# EAGLE board Qwiic_Differential_Pressure_Sensor-SDP31-Panel (EAGLE 9.6.2), part 1 of 3
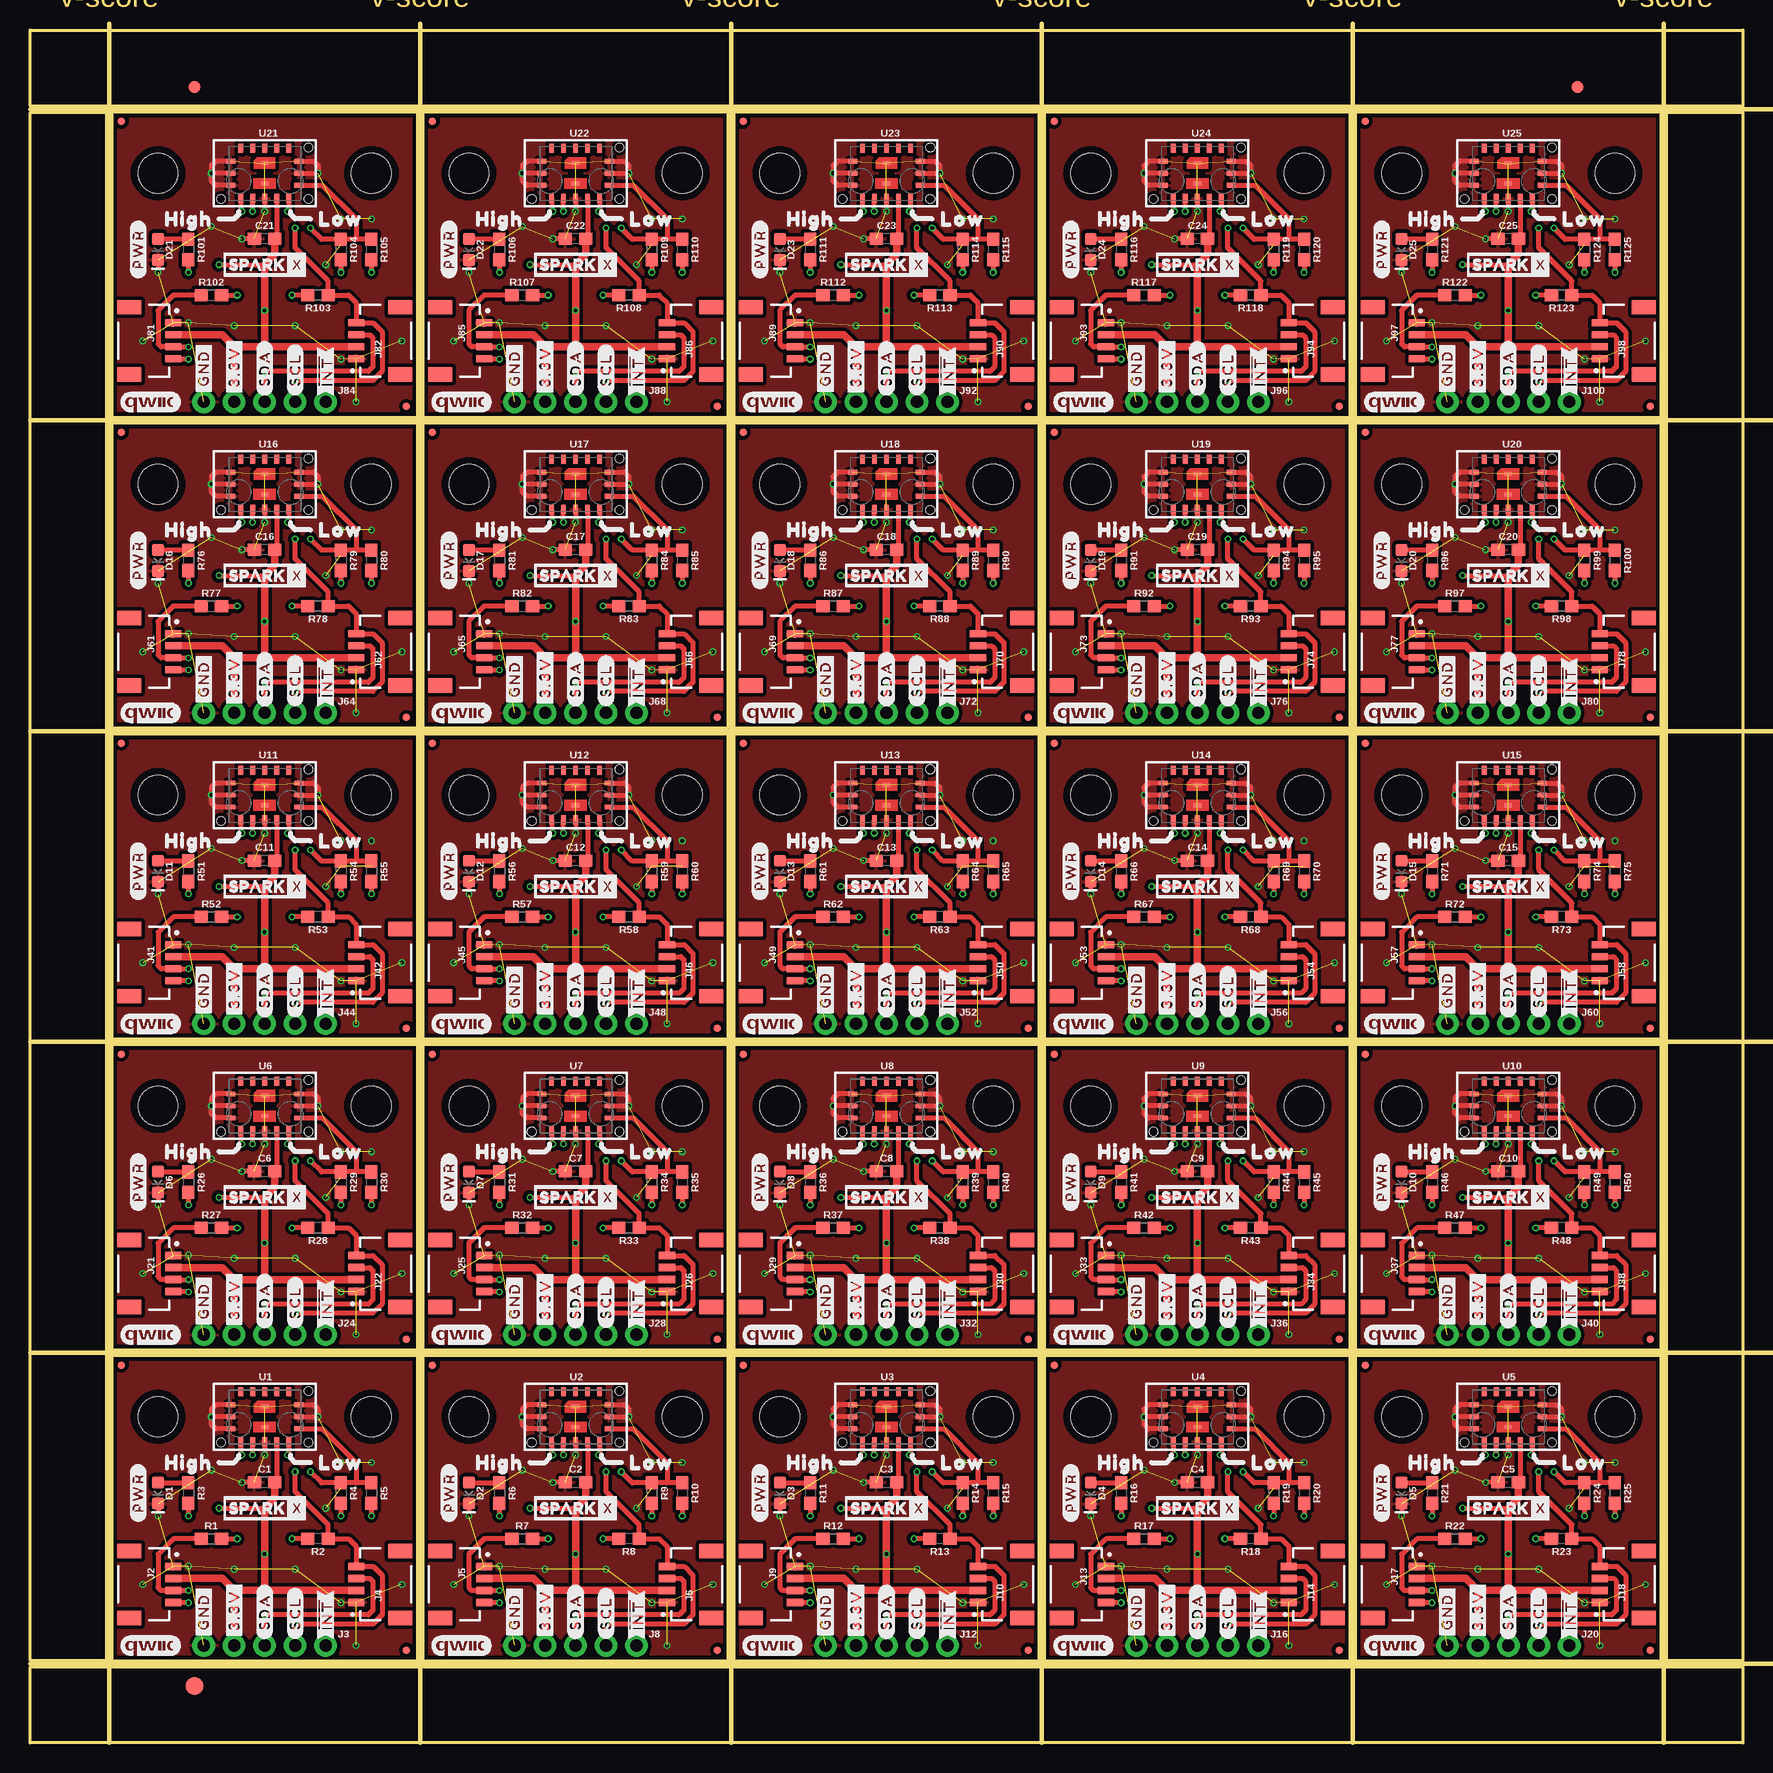
[diagram p0: board, top side]
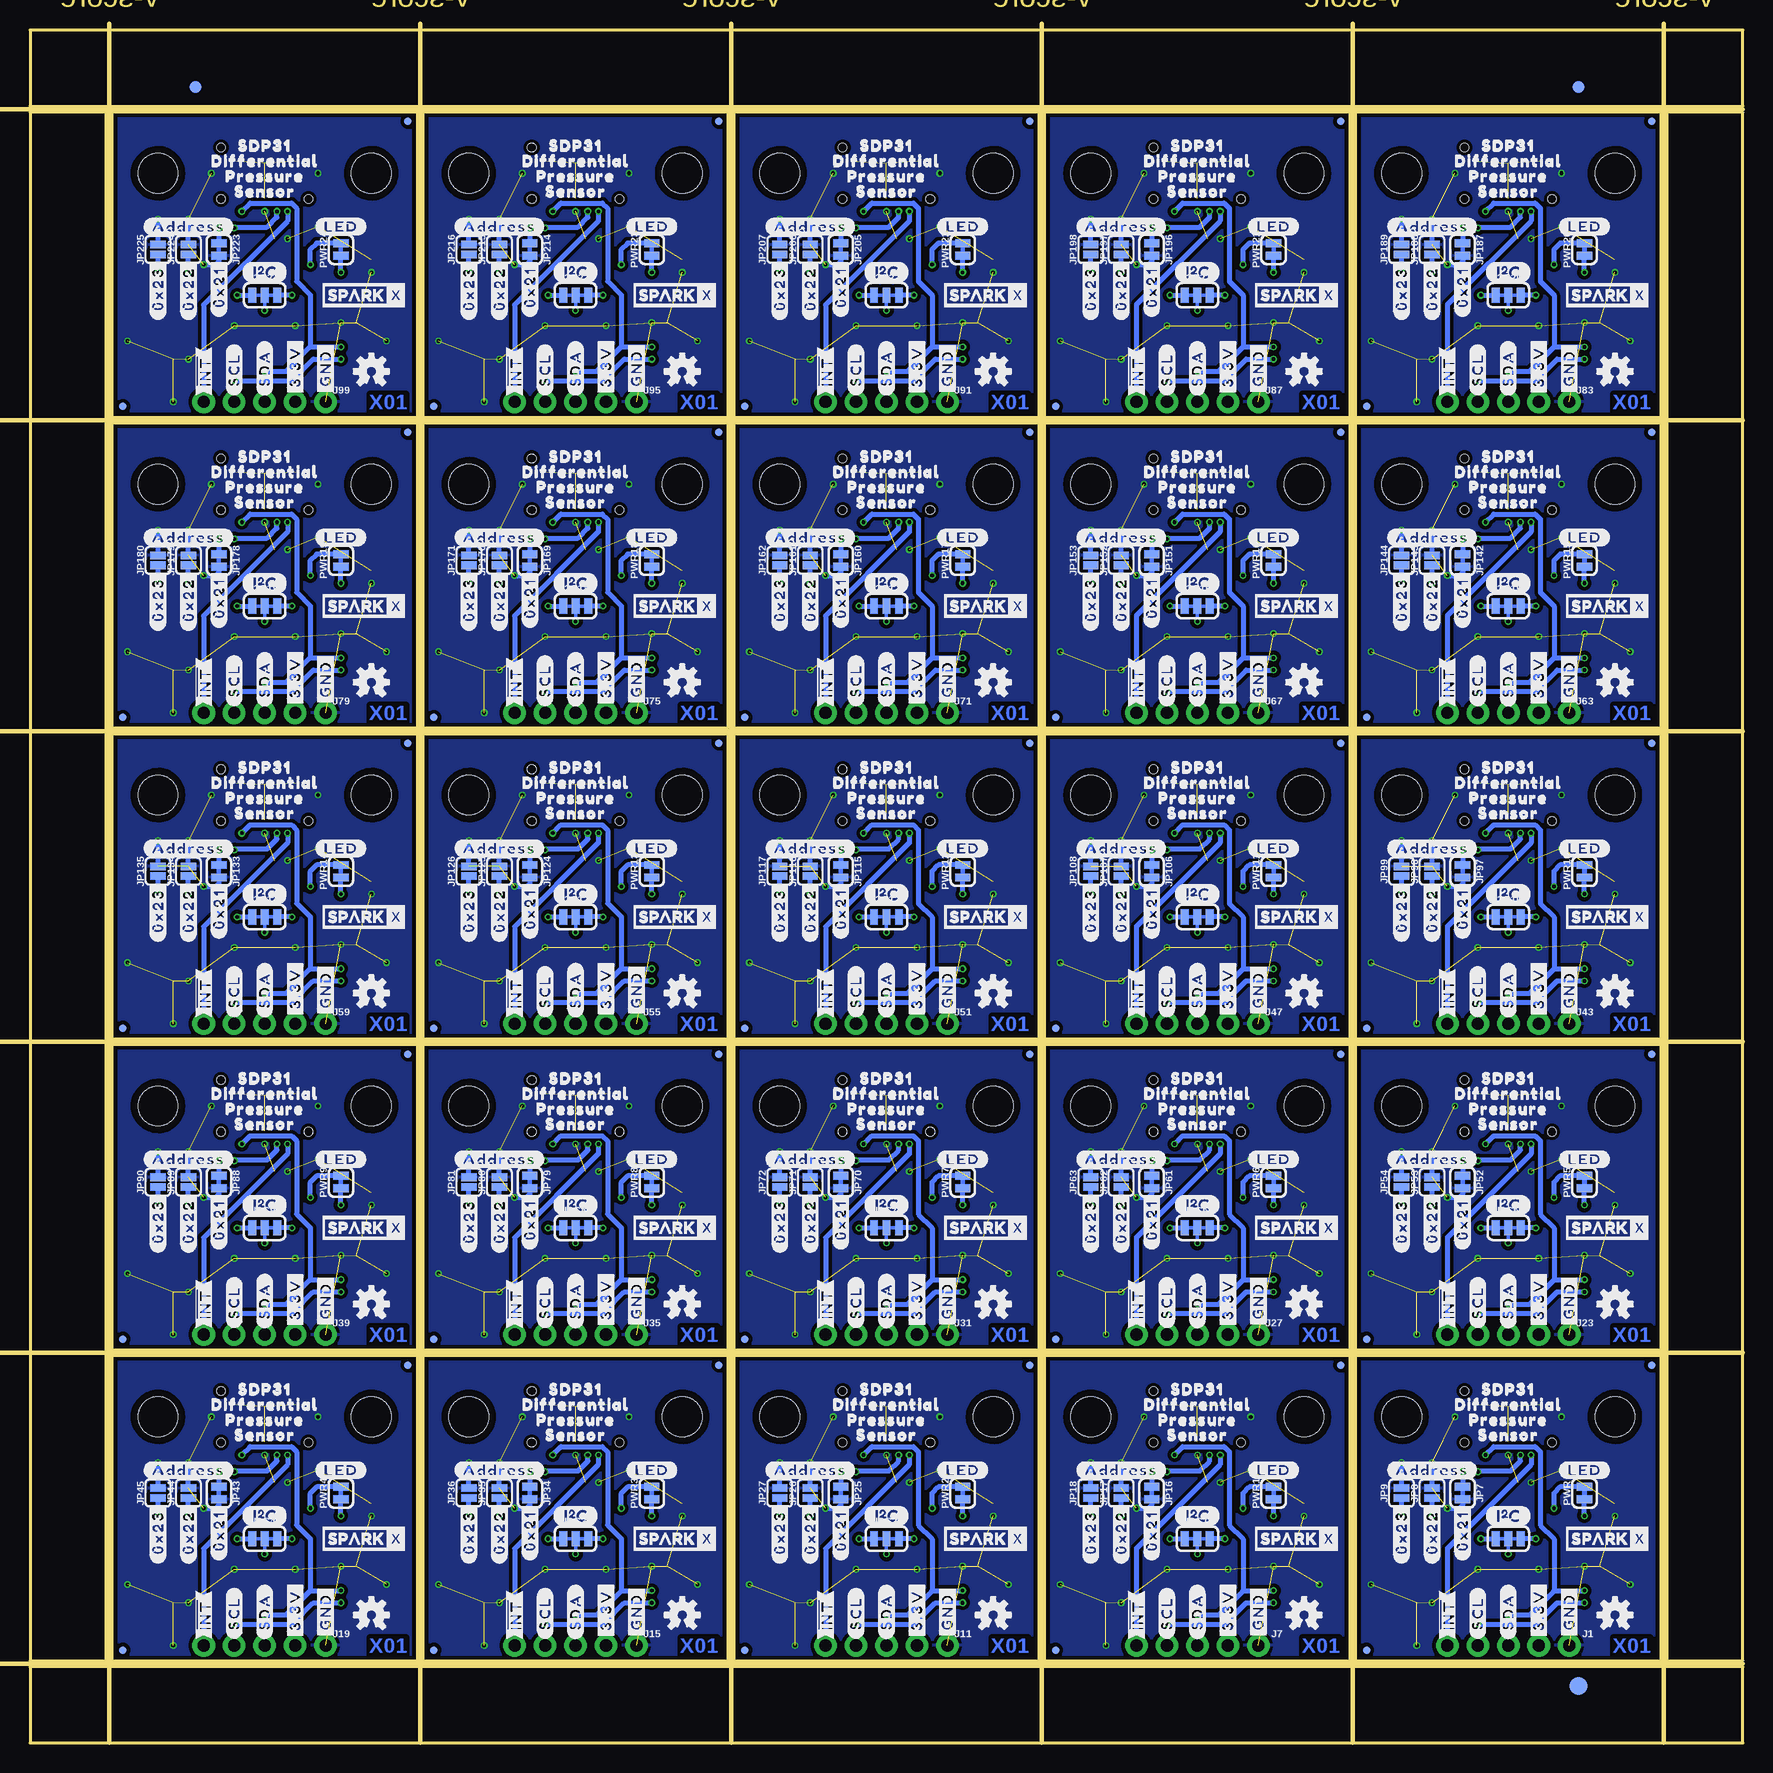
[diagram p1: board, bottom side, seen from below]

Size 142.75 x 142.75 mm. Coordinates in mm from the lower left corner, seen from the top.
Outline: 6.86,6.86 6.86,32.26 32.26,32.26 32.26,6.86 6.86,6.86
Outline: 32.77,6.86 32.77,32.26 58.17,32.26 58.17,6.86 32.77,6.86
Outline: 58.67,6.86 58.67,32.26 84.07,32.26 84.07,6.86 58.67,6.86
Outline: 84.58,6.86 84.58,32.26 109.98,32.26 109.98,6.86 84.58,6.86
Outline: 110.49,6.86 110.49,32.26 135.89,32.26 135.89,6.86 110.49,6.86
Outline: 6.86,32.77 6.86,58.17 32.26,58.17 32.26,32.77 6.86,32.77
Outline: 32.77,32.77 32.77,58.17 58.17,58.17 58.17,32.77 32.77,32.77
Outline: 58.67,32.77 58.67,58.17 84.07,58.17 84.07,32.77 58.67,32.77
Outline: 84.58,32.77 84.58,58.17 109.98,58.17 109.98,32.77 84.58,32.77
Outline: 110.49,32.77 110.49,58.17 135.89,58.17 135.89,32.77 110.49,32.77
Outline: 6.86,58.67 6.86,84.07 32.26,84.07 32.26,58.67 6.86,58.67
Outline: 32.77,58.67 32.77,84.07 58.17,84.07 58.17,58.67 32.77,58.67
Outline: 58.67,58.67 58.67,84.07 84.07,84.07 84.07,58.67 58.67,58.67
Outline: 84.58,58.67 84.58,84.07 109.98,84.07 109.98,58.67 84.58,58.67
Outline: 110.49,58.67 110.49,84.07 135.89,84.07 135.89,58.67 110.49,58.67
Outline: 6.86,84.58 6.86,109.98 32.26,109.98 32.26,84.58 6.86,84.58
Outline: 32.77,84.58 32.77,109.98 58.17,109.98 58.17,84.58 32.77,84.58
Outline: 58.67,84.58 58.67,109.98 84.07,109.98 84.07,84.58 58.67,84.58
Outline: 84.58,84.58 84.58,109.98 109.98,109.98 109.98,84.58 84.58,84.58
Outline: 110.49,84.58 110.49,109.98 135.89,109.98 135.89,84.58 110.49,84.58
Outline: 6.86,110.49 6.86,135.89 32.26,135.89 32.26,110.49 6.86,110.49
Outline: 32.77,110.49 32.77,135.89 58.17,135.89 58.17,110.49 32.77,110.49
Outline: 58.67,110.49 58.67,135.89 84.07,135.89 84.07,110.49 58.67,110.49
Outline: 84.58,110.49 84.58,135.89 109.98,135.89 109.98,110.49 84.58,110.49
Outline: 110.49,110.49 110.49,135.89 135.89,135.89 135.89,110.49 110.49,110.49
Outline: 0,6.35 142.75,6.35 142.75,0 0,0 0,6.35
Outline: 136.4,135.89 142.75,135.89 142.75,6.86 136.4,6.86 136.4,135.89
Outline: 0,142.75 142.75,142.75 142.75,136.4 0,136.4 0,142.75
Outline: 0,135.89 6.35,135.89 6.35,6.86 0,6.86 0,135.89
Copper layers (1+2*15+16): Top 0.035mm / dielectric 0.2mm / Route2 0.0175mm / dielectric 1.065mm / Route15 0.0175mm / dielectric 0.2mm / Bottom 0.035mm
Design rules "Qwiic_Differential_Pressure_Sensor-SDP31": minimum track width 5mil, minimum drill 0.2mm, track to track 5mil, track to pad 0.2mm, pad to pad 5mil, via to via 0.2mm, smd to smd 0mil, copper to edge 0.2mm, drill to drill 10mil, minimum pad ring 0.13mm, minimum via ring 0.13mm, stop-mask expansion 0.05mm, vias tented up to drill 25mil, thermal gap 10mil
Milling: 12 lines

## Footprints (pad centres in the part's own frame; a part is rotated, then mirrored left to right if it is on the bottom)
0603 = smd 1.1 x 1: 1 -0.85,0; 2 0.85,0
LED-0603 = smd 1 x 1: A -0.877,0; C 0.877,0
FIDUCIAL-1X2 = smd 1 x 1: 1 0,0
FIDUCIAL-1.5X3 = smd 1.5 x 1.5: 1 0,0
SMT-JUMPER_3_2-NC_TRACE_SILK = smd 0.66 x 1.27: 1 -1.041,0; 2 0,0; 3 1.041,0
1X04_NO_SILK = drill 1.016 pad 1.88: 1 0,0; 2 2.54,0; 3 5.08,0; 4 7.62,0
JST04_1MM_RA = smd 0.6 x 1.35: 1 -1.5,0; 2 -0.5,0; 3 0.5,0; 4 1.5,0 | smd 1.2 x 2: NC1 2.8,-3.675; NC2 -2.8,-3.675
1X01_NO_SILK = drill 1.016 pad 1.88: 1 0,0
FIDUCIAL-MICRO = smd 0.635 x 0.635: 1 0,0
STAND-OFF = hole 3.302: 0,0
SMT-JUMPER_2_NC_TRACE_SILK = smd 0.66 x 1.27: 1 -0.521,0; 2 0.521,0
SMT-JUMPER_2_NO_SILK = smd 0.635 x 1.27: 1 -0.406,0; 2 0.406,0
SDP3X = smd 0.75 x 0.4: 1 -2.825,1; 2 -2.825,0; 3 -2.825,-1; 9 2.825,-1; 10 2.825,0; 11 2.825,1 | smd 0.4 x 0.75: 4 -2,-2.075; 5 -1,-2.075; 6 0,-2.075; 7 1,-2.075; 8 2,-2.075; 12 2,2.075; 13 1,2.075; 14 0,2.075; 15 -1,2.075; 16 -2,2.075 | smd 0.61 x 0.305: DIEPAD1 0,0.85; DIEPAD2 0,-0.85 | hole 0.7: -3.65,-2.15; 3.65,-2.15; 3.65,2.15

## Placement (x,y rotation side)
C1  0.1uF  [0603]  19.56,21.72 180 top
C2  0.1uF  [0603]  45.47,21.72 180 top
C3  0.1uF  [0603]  71.37,21.72 180 top
C4  0.1uF  [0603]  97.28,21.72 180 top
C5  0.1uF  [0603]  123.19,21.72 180 top
C6  0.1uF  [0603]  19.56,47.62 180 top
C7  0.1uF  [0603]  45.47,47.62 180 top
C8  0.1uF  [0603]  71.37,47.62 180 top
C9  0.1uF  [0603]  97.28,47.62 180 top
C10  0.1uF  [0603]  123.19,47.62 180 top
C11  0.1uF  [0603]  19.56,73.53 180 top
C12  0.1uF  [0603]  45.47,73.53 180 top
C13  0.1uF  [0603]  71.37,73.53 180 top
C14  0.1uF  [0603]  97.28,73.53 180 top
C15  0.1uF  [0603]  123.19,73.53 180 top
C16  0.1uF  [0603]  19.56,99.44 180 top
C17  0.1uF  [0603]  45.47,99.44 180 top
C18  0.1uF  [0603]  71.37,99.44 180 top
C19  0.1uF  [0603]  97.28,99.44 180 top
C20  0.1uF  [0603]  123.19,99.44 180 top
C21  0.1uF  [0603]  19.56,125.35 180 top
C22  0.1uF  [0603]  45.47,125.35 180 top
C23  0.1uF  [0603]  71.37,125.35 180 top
C24  0.1uF  [0603]  97.28,125.35 180 top
C25  0.1uF  [0603]  123.19,125.35 180 top
D1  RED  [LED-0603]  10.67,20.83 270 top
D2  RED  [LED-0603]  36.58,20.83 270 top
D3  RED  [LED-0603]  62.48,20.83 270 top
D4  RED  [LED-0603]  88.39,20.83 270 top
D5  RED  [LED-0603]  114.3,20.83 270 top
D6  RED  [LED-0603]  10.67,46.74 270 top
D7  RED  [LED-0603]  36.58,46.74 270 top
D8  RED  [LED-0603]  62.48,46.74 270 top
D9  RED  [LED-0603]  88.39,46.74 270 top
D10  RED  [LED-0603]  114.3,46.74 270 top
D11  RED  [LED-0603]  10.67,72.64 270 top
D12  RED  [LED-0603]  36.58,72.64 270 top
D13  RED  [LED-0603]  62.48,72.64 270 top
D14  RED  [LED-0603]  88.39,72.64 270 top
D15  RED  [LED-0603]  114.3,72.64 270 top
D16  RED  [LED-0603]  10.67,98.55 270 top
D17  RED  [LED-0603]  36.58,98.55 270 top
D18  RED  [LED-0603]  62.48,98.55 270 top
D19  RED  [LED-0603]  88.39,98.55 270 top
D20  RED  [LED-0603]  114.3,98.55 270 top
D21  RED  [LED-0603]  10.67,124.46 270 top
D22  RED  [LED-0603]  36.58,124.46 270 top
D23  RED  [LED-0603]  62.48,124.46 270 top
D24  RED  [LED-0603]  88.39,124.46 270 top
D25  RED  [LED-0603]  114.3,124.46 270 top
E$1  [FIDUCIAL-1X2]  13.72,137.99 0 top
E$2  [FIDUCIAL-1X2]  13.72,137.99 0 bottom
E$3  [FIDUCIAL-1X2]  128.97,137.99 0 top
E$4  [FIDUCIAL-1X2]  128.97,137.99 0 bottom
E$5  [FIDUCIAL-1.5X3]  13.72,4.76 0 top
E$6  [FIDUCIAL-1.5X3]  13.72,4.76 0 bottom
I2C  JUMPER-SMT_3_2-NC_TRACE_SILK  [SMT-JUMPER_3_2-NC_TRACE_SILK]  19.56,17.02 0 bottom
I2C1  JUMPER-SMT_3_2-NC_TRACE_SILK  [SMT-JUMPER_3_2-NC_TRACE_SILK]  45.47,17.02 0 bottom
I2C2  JUMPER-SMT_3_2-NC_TRACE_SILK  [SMT-JUMPER_3_2-NC_TRACE_SILK]  71.37,17.02 0 bottom
I2C3  JUMPER-SMT_3_2-NC_TRACE_SILK  [SMT-JUMPER_3_2-NC_TRACE_SILK]  97.28,17.02 0 bottom
I2C4  JUMPER-SMT_3_2-NC_TRACE_SILK  [SMT-JUMPER_3_2-NC_TRACE_SILK]  123.19,17.02 0 bottom
I2C5  JUMPER-SMT_3_2-NC_TRACE_SILK  [SMT-JUMPER_3_2-NC_TRACE_SILK]  19.56,42.93 0 bottom
I2C6  JUMPER-SMT_3_2-NC_TRACE_SILK  [SMT-JUMPER_3_2-NC_TRACE_SILK]  45.47,42.93 0 bottom
I2C7  JUMPER-SMT_3_2-NC_TRACE_SILK  [SMT-JUMPER_3_2-NC_TRACE_SILK]  71.37,42.93 0 bottom
I2C8  JUMPER-SMT_3_2-NC_TRACE_SILK  [SMT-JUMPER_3_2-NC_TRACE_SILK]  97.28,42.93 0 bottom
I2C9  JUMPER-SMT_3_2-NC_TRACE_SILK  [SMT-JUMPER_3_2-NC_TRACE_SILK]  123.19,42.93 0 bottom
I2C10  JUMPER-SMT_3_2-NC_TRACE_SILK  [SMT-JUMPER_3_2-NC_TRACE_SILK]  19.56,68.83 0 bottom
I2C11  JUMPER-SMT_3_2-NC_TRACE_SILK  [SMT-JUMPER_3_2-NC_TRACE_SILK]  45.47,68.83 0 bottom
I2C12  JUMPER-SMT_3_2-NC_TRACE_SILK  [SMT-JUMPER_3_2-NC_TRACE_SILK]  71.37,68.83 0 bottom
I2C13  JUMPER-SMT_3_2-NC_TRACE_SILK  [SMT-JUMPER_3_2-NC_TRACE_SILK]  97.28,68.83 0 bottom
I2C14  JUMPER-SMT_3_2-NC_TRACE_SILK  [SMT-JUMPER_3_2-NC_TRACE_SILK]  123.19,68.83 0 bottom
I2C15  JUMPER-SMT_3_2-NC_TRACE_SILK  [SMT-JUMPER_3_2-NC_TRACE_SILK]  19.56,94.74 0 bottom
I2C16  JUMPER-SMT_3_2-NC_TRACE_SILK  [SMT-JUMPER_3_2-NC_TRACE_SILK]  45.47,94.74 0 bottom
I2C17  JUMPER-SMT_3_2-NC_TRACE_SILK  [SMT-JUMPER_3_2-NC_TRACE_SILK]  71.37,94.74 0 bottom
I2C18  JUMPER-SMT_3_2-NC_TRACE_SILK  [SMT-JUMPER_3_2-NC_TRACE_SILK]  97.28,94.74 0 bottom
I2C19  JUMPER-SMT_3_2-NC_TRACE_SILK  [SMT-JUMPER_3_2-NC_TRACE_SILK]  123.19,94.74 0 bottom
I2C20  JUMPER-SMT_3_2-NC_TRACE_SILK  [SMT-JUMPER_3_2-NC_TRACE_SILK]  19.56,120.65 0 bottom
I2C21  JUMPER-SMT_3_2-NC_TRACE_SILK  [SMT-JUMPER_3_2-NC_TRACE_SILK]  45.47,120.65 0 bottom
I2C22  JUMPER-SMT_3_2-NC_TRACE_SILK  [SMT-JUMPER_3_2-NC_TRACE_SILK]  71.37,120.65 0 bottom
I2C23  JUMPER-SMT_3_2-NC_TRACE_SILK  [SMT-JUMPER_3_2-NC_TRACE_SILK]  97.28,120.65 0 bottom
I2C24  JUMPER-SMT_3_2-NC_TRACE_SILK  [SMT-JUMPER_3_2-NC_TRACE_SILK]  123.19,120.65 0 bottom
J1  [1X04_NO_SILK]  14.48,8.13 180 bottom
J2  QWIIC_RIGHT_ANGLE  [JST04_1MM_RA]  11.94,13.21 270 top
J3  [1X01_NO_SILK]  24.64,8.13 0 top
J4  QWIIC_RIGHT_ANGLE  [JST04_1MM_RA]  27.18,13.21 90 top
J5  QWIIC_RIGHT_ANGLE  [JST04_1MM_RA]  37.85,13.21 270 top
J6  QWIIC_RIGHT_ANGLE  [JST04_1MM_RA]  53.09,13.21 90 top
J7  [1X04_NO_SILK]  40.39,8.13 180 bottom
J8  [1X01_NO_SILK]  50.55,8.13 0 top
J9  QWIIC_RIGHT_ANGLE  [JST04_1MM_RA]  63.75,13.21 270 top
J10  QWIIC_RIGHT_ANGLE  [JST04_1MM_RA]  78.99,13.21 90 top
J11  [1X04_NO_SILK]  66.29,8.13 180 bottom
J12  [1X01_NO_SILK]  76.45,8.13 0 top
J13  QWIIC_RIGHT_ANGLE  [JST04_1MM_RA]  89.66,13.21 270 top
J14  QWIIC_RIGHT_ANGLE  [JST04_1MM_RA]  104.9,13.21 90 top
J15  [1X04_NO_SILK]  92.2,8.13 180 bottom
J16  [1X01_NO_SILK]  102.36,8.13 0 top
J17  QWIIC_RIGHT_ANGLE  [JST04_1MM_RA]  115.57,13.21 270 top
J18  QWIIC_RIGHT_ANGLE  [JST04_1MM_RA]  130.81,13.21 90 top
J19  [1X04_NO_SILK]  118.11,8.13 180 bottom
J20  [1X01_NO_SILK]  128.27,8.13 0 top
J21  QWIIC_RIGHT_ANGLE  [JST04_1MM_RA]  11.94,39.12 270 top
J22  QWIIC_RIGHT_ANGLE  [JST04_1MM_RA]  27.18,39.12 90 top
J23  [1X04_NO_SILK]  14.48,34.04 180 bottom
J24  [1X01_NO_SILK]  24.64,34.04 0 top
J25  QWIIC_RIGHT_ANGLE  [JST04_1MM_RA]  37.85,39.12 270 top
J26  QWIIC_RIGHT_ANGLE  [JST04_1MM_RA]  53.09,39.12 90 top
J27  [1X04_NO_SILK]  40.39,34.04 180 bottom
J28  [1X01_NO_SILK]  50.55,34.04 0 top
J29  QWIIC_RIGHT_ANGLE  [JST04_1MM_RA]  63.75,39.12 270 top
J30  QWIIC_RIGHT_ANGLE  [JST04_1MM_RA]  78.99,39.12 90 top
J31  [1X04_NO_SILK]  66.29,34.04 180 bottom
J32  [1X01_NO_SILK]  76.45,34.04 0 top
J33  QWIIC_RIGHT_ANGLE  [JST04_1MM_RA]  89.66,39.12 270 top
J34  QWIIC_RIGHT_ANGLE  [JST04_1MM_RA]  104.9,39.12 90 top
J35  [1X04_NO_SILK]  92.2,34.04 180 bottom
J36  [1X01_NO_SILK]  102.36,34.04 0 top
J37  QWIIC_RIGHT_ANGLE  [JST04_1MM_RA]  115.57,39.12 270 top
J38  QWIIC_RIGHT_ANGLE  [JST04_1MM_RA]  130.81,39.12 90 top
J39  [1X04_NO_SILK]  118.11,34.04 180 bottom
J40  [1X01_NO_SILK]  128.27,34.04 0 top
J41  QWIIC_RIGHT_ANGLE  [JST04_1MM_RA]  11.94,65.02 270 top
J42  QWIIC_RIGHT_ANGLE  [JST04_1MM_RA]  27.18,65.02 90 top
J43  [1X04_NO_SILK]  14.48,59.94 180 bottom
J44  [1X01_NO_SILK]  24.64,59.94 0 top
J45  QWIIC_RIGHT_ANGLE  [JST04_1MM_RA]  37.85,65.02 270 top
J46  QWIIC_RIGHT_ANGLE  [JST04_1MM_RA]  53.09,65.02 90 top
J47  [1X04_NO_SILK]  40.39,59.94 180 bottom
J48  [1X01_NO_SILK]  50.55,59.94 0 top
J49  QWIIC_RIGHT_ANGLE  [JST04_1MM_RA]  63.75,65.02 270 top
J50  QWIIC_RIGHT_ANGLE  [JST04_1MM_RA]  78.99,65.02 90 top
J51  [1X04_NO_SILK]  66.29,59.94 180 bottom
J52  [1X01_NO_SILK]  76.45,59.94 0 top
J53  QWIIC_RIGHT_ANGLE  [JST04_1MM_RA]  89.66,65.02 270 top
J54  QWIIC_RIGHT_ANGLE  [JST04_1MM_RA]  104.9,65.02 90 top
J55  [1X04_NO_SILK]  92.2,59.94 180 bottom
J56  [1X01_NO_SILK]  102.36,59.94 0 top
J57  QWIIC_RIGHT_ANGLE  [JST04_1MM_RA]  115.57,65.02 270 top
J58  QWIIC_RIGHT_ANGLE  [JST04_1MM_RA]  130.81,65.02 90 top
J59  [1X04_NO_SILK]  118.11,59.94 180 bottom
J60  [1X01_NO_SILK]  128.27,59.94 0 top
J61  QWIIC_RIGHT_ANGLE  [JST04_1MM_RA]  11.94,90.93 270 top
J62  QWIIC_RIGHT_ANGLE  [JST04_1MM_RA]  27.18,90.93 90 top
J63  [1X04_NO_SILK]  14.48,85.85 180 bottom
J64  [1X01_NO_SILK]  24.64,85.85 0 top
J65  QWIIC_RIGHT_ANGLE  [JST04_1MM_RA]  37.85,90.93 270 top
J66  QWIIC_RIGHT_ANGLE  [JST04_1MM_RA]  53.09,90.93 90 top
J67  [1X04_NO_SILK]  40.39,85.85 180 bottom
J68  [1X01_NO_SILK]  50.55,85.85 0 top
J69  QWIIC_RIGHT_ANGLE  [JST04_1MM_RA]  63.75,90.93 270 top
J70  QWIIC_RIGHT_ANGLE  [JST04_1MM_RA]  78.99,90.93 90 top
J71  [1X04_NO_SILK]  66.29,85.85 180 bottom
J72  [1X01_NO_SILK]  76.45,85.85 0 top
J73  QWIIC_RIGHT_ANGLE  [JST04_1MM_RA]  89.66,90.93 270 top
J74  QWIIC_RIGHT_ANGLE  [JST04_1MM_RA]  104.9,90.93 90 top
J75  [1X04_NO_SILK]  92.2,85.85 180 bottom
J76  [1X01_NO_SILK]  102.36,85.85 0 top
J77  QWIIC_RIGHT_ANGLE  [JST04_1MM_RA]  115.57,90.93 270 top
J78  QWIIC_RIGHT_ANGLE  [JST04_1MM_RA]  130.81,90.93 90 top
J79  [1X04_NO_SILK]  118.11,85.85 180 bottom
J80  [1X01_NO_SILK]  128.27,85.85 0 top
J81  QWIIC_RIGHT_ANGLE  [JST04_1MM_RA]  11.94,116.84 270 top
J82  QWIIC_RIGHT_ANGLE  [JST04_1MM_RA]  27.18,116.84 90 top
J83  [1X04_NO_SILK]  14.48,111.76 180 bottom
J84  [1X01_NO_SILK]  24.64,111.76 0 top
J85  QWIIC_RIGHT_ANGLE  [JST04_1MM_RA]  37.85,116.84 270 top
J86  QWIIC_RIGHT_ANGLE  [JST04_1MM_RA]  53.09,116.84 90 top
J87  [1X04_NO_SILK]  40.39,111.76 180 bottom
J88  [1X01_NO_SILK]  50.55,111.76 0 top
J89  QWIIC_RIGHT_ANGLE  [JST04_1MM_RA]  63.75,116.84 270 top
J90  QWIIC_RIGHT_ANGLE  [JST04_1MM_RA]  78.99,116.84 90 top
J91  [1X04_NO_SILK]  66.29,111.76 180 bottom
J92  [1X01_NO_SILK]  76.45,111.76 0 top
J93  QWIIC_RIGHT_ANGLE  [JST04_1MM_RA]  89.66,116.84 270 top
J94  QWIIC_RIGHT_ANGLE  [JST04_1MM_RA]  104.9,116.84 90 top
J95  [1X04_NO_SILK]  92.2,111.76 180 bottom
J96  [1X01_NO_SILK]  102.36,111.76 0 top
J97  QWIIC_RIGHT_ANGLE  [JST04_1MM_RA]  115.57,116.84 270 top
J98  QWIIC_RIGHT_ANGLE  [JST04_1MM_RA]  130.81,116.84 90 top
J99  [1X04_NO_SILK]  118.11,111.76 180 bottom
J100  [1X01_NO_SILK]  128.27,111.76 0 top
JP1  FIDUCIALUFIDUCIAL  [FIDUCIAL-MICRO]  7.62,31.5 0 bottom
JP2  FIDUCIALUFIDUCIAL  [FIDUCIAL-MICRO]  31.37,7.75 0 top
JP3  STAND-OFF  [STAND-OFF]  10.67,27.18 0 top
JP4  STAND-OFF  [STAND-OFF]  28.45,27.18 0 top
JP5  FIDUCIALUFIDUCIAL  [FIDUCIAL-MICRO]  31.37,7.75 0 bottom
JP6  FIDUCIALUFIDUCIAL  [FIDUCIAL-MICRO]  7.62,31.5 0 top
JP7  JUMPER-SMT_2_NC_TRACE_SILK  [SMT-JUMPER_2_NC_TRACE_SILK]  23.37,20.83 270 bottom
JP8  JUMPER-SMT_2_NO_SILK  [SMT-JUMPER_2_NO_SILK]  25.91,20.83 90 bottom
JP9  JUMPER-SMT_2_NO_SILK  [SMT-JUMPER_2_NO_SILK]  28.45,20.83 90 bottom
JP10  STAND-OFF  [STAND-OFF]  36.58,27.18 0 top
JP11  STAND-OFF  [STAND-OFF]  54.36,27.18 0 top
JP12  FIDUCIALUFIDUCIAL  [FIDUCIAL-MICRO]  57.28,7.75 0 top
JP13  FIDUCIALUFIDUCIAL  [FIDUCIAL-MICRO]  33.53,31.5 0 top
JP14  FIDUCIALUFIDUCIAL  [FIDUCIAL-MICRO]  33.53,31.5 0 bottom
JP15  FIDUCIALUFIDUCIAL  [FIDUCIAL-MICRO]  57.28,7.75 0 bottom
JP16  JUMPER-SMT_2_NC_TRACE_SILK  [SMT-JUMPER_2_NC_TRACE_SILK]  49.28,20.83 270 bottom
JP17  JUMPER-SMT_2_NO_SILK  [SMT-JUMPER_2_NO_SILK]  51.82,20.83 90 bottom
JP18  JUMPER-SMT_2_NO_SILK  [SMT-JUMPER_2_NO_SILK]  54.36,20.83 90 bottom
JP19  STAND-OFF  [STAND-OFF]  62.48,27.18 0 top
JP20  STAND-OFF  [STAND-OFF]  80.26,27.18 0 top
JP21  FIDUCIALUFIDUCIAL  [FIDUCIAL-MICRO]  83.19,7.75 0 top
JP22  FIDUCIALUFIDUCIAL  [FIDUCIAL-MICRO]  59.44,31.5 0 top
JP23  FIDUCIALUFIDUCIAL  [FIDUCIAL-MICRO]  59.44,31.5 0 bottom
JP24  FIDUCIALUFIDUCIAL  [FIDUCIAL-MICRO]  83.19,7.75 0 bottom
JP25  JUMPER-SMT_2_NC_TRACE_SILK  [SMT-JUMPER_2_NC_TRACE_SILK]  75.18,20.83 270 bottom
JP26  JUMPER-SMT_2_NO_SILK  [SMT-JUMPER_2_NO_SILK]  77.72,20.83 90 bottom
JP27  JUMPER-SMT_2_NO_SILK  [SMT-JUMPER_2_NO_SILK]  80.26,20.83 90 bottom
JP28  STAND-OFF  [STAND-OFF]  88.39,27.18 0 top
JP29  STAND-OFF  [STAND-OFF]  106.17,27.18 0 top
JP30  FIDUCIALUFIDUCIAL  [FIDUCIAL-MICRO]  109.09,7.75 0 top
JP31  FIDUCIALUFIDUCIAL  [FIDUCIAL-MICRO]  85.34,31.5 0 top
JP32  FIDUCIALUFIDUCIAL  [FIDUCIAL-MICRO]  85.34,31.5 0 bottom
JP33  FIDUCIALUFIDUCIAL  [FIDUCIAL-MICRO]  109.09,7.75 0 bottom
JP34  JUMPER-SMT_2_NC_TRACE_SILK  [SMT-JUMPER_2_NC_TRACE_SILK]  101.09,20.83 270 bottom
JP35  JUMPER-SMT_2_NO_SILK  [SMT-JUMPER_2_NO_SILK]  103.63,20.83 90 bottom
JP36  JUMPER-SMT_2_NO_SILK  [SMT-JUMPER_2_NO_SILK]  106.17,20.83 90 bottom
JP37  STAND-OFF  [STAND-OFF]  114.3,27.18 0 top
JP38  STAND-OFF  [STAND-OFF]  132.08,27.18 0 top
JP39  FIDUCIALUFIDUCIAL  [FIDUCIAL-MICRO]  135,7.75 0 top
JP40  FIDUCIALUFIDUCIAL  [FIDUCIAL-MICRO]  111.25,31.5 0 top
JP41  FIDUCIALUFIDUCIAL  [FIDUCIAL-MICRO]  111.25,31.5 0 bottom
JP42  FIDUCIALUFIDUCIAL  [FIDUCIAL-MICRO]  135,7.75 0 bottom
JP43  JUMPER-SMT_2_NC_TRACE_SILK  [SMT-JUMPER_2_NC_TRACE_SILK]  127,20.83 270 bottom
JP44  JUMPER-SMT_2_NO_SILK  [SMT-JUMPER_2_NO_SILK]  129.54,20.83 90 bottom
JP45  JUMPER-SMT_2_NO_SILK  [SMT-JUMPER_2_NO_SILK]  132.08,20.83 90 bottom
JP46  STAND-OFF  [STAND-OFF]  10.67,53.09 0 top
JP47  STAND-OFF  [STAND-OFF]  28.45,53.09 0 top
JP48  FIDUCIALUFIDUCIAL  [FIDUCIAL-MICRO]  31.37,33.66 0 top
JP49  FIDUCIALUFIDUCIAL  [FIDUCIAL-MICRO]  7.62,57.4 0 top
JP50  FIDUCIALUFIDUCIAL  [FIDUCIAL-MICRO]  7.62,57.4 0 bottom
JP51  FIDUCIALUFIDUCIAL  [FIDUCIAL-MICRO]  31.37,33.66 0 bottom
JP52  JUMPER-SMT_2_NC_TRACE_SILK  [SMT-JUMPER_2_NC_TRACE_SILK]  23.37,46.74 270 bottom
JP53  JUMPER-SMT_2_NO_SILK  [SMT-JUMPER_2_NO_SILK]  25.91,46.74 90 bottom
JP54  JUMPER-SMT_2_NO_SILK  [SMT-JUMPER_2_NO_SILK]  28.45,46.74 90 bottom
JP55  STAND-OFF  [STAND-OFF]  36.58,53.09 0 top
JP56  STAND-OFF  [STAND-OFF]  54.36,53.09 0 top
JP57  FIDUCIALUFIDUCIAL  [FIDUCIAL-MICRO]  57.28,33.66 0 top
JP58  FIDUCIALUFIDUCIAL  [FIDUCIAL-MICRO]  33.53,57.4 0 top
JP59  FIDUCIALUFIDUCIAL  [FIDUCIAL-MICRO]  33.53,57.4 0 bottom
JP60  FIDUCIALUFIDUCIAL  [FIDUCIAL-MICRO]  57.28,33.66 0 bottom
JP61  JUMPER-SMT_2_NC_TRACE_SILK  [SMT-JUMPER_2_NC_TRACE_SILK]  49.28,46.74 270 bottom
JP62  JUMPER-SMT_2_NO_SILK  [SMT-JUMPER_2_NO_SILK]  51.82,46.74 90 bottom
JP63  JUMPER-SMT_2_NO_SILK  [SMT-JUMPER_2_NO_SILK]  54.36,46.74 90 bottom
JP64  STAND-OFF  [STAND-OFF]  62.48,53.09 0 top
JP65  STAND-OFF  [STAND-OFF]  80.26,53.09 0 top
JP66  FIDUCIALUFIDUCIAL  [FIDUCIAL-MICRO]  83.19,33.66 0 top
JP67  FIDUCIALUFIDUCIAL  [FIDUCIAL-MICRO]  59.44,57.4 0 top
JP68  FIDUCIALUFIDUCIAL  [FIDUCIAL-MICRO]  59.44,57.4 0 bottom
JP69  FIDUCIALUFIDUCIAL  [FIDUCIAL-MICRO]  83.19,33.66 0 bottom
JP70  JUMPER-SMT_2_NC_TRACE_SILK  [SMT-JUMPER_2_NC_TRACE_SILK]  75.18,46.74 270 bottom
JP71  JUMPER-SMT_2_NO_SILK  [SMT-JUMPER_2_NO_SILK]  77.72,46.74 90 bottom
JP72  JUMPER-SMT_2_NO_SILK  [SMT-JUMPER_2_NO_SILK]  80.26,46.74 90 bottom
JP73  STAND-OFF  [STAND-OFF]  88.39,53.09 0 top
JP74  STAND-OFF  [STAND-OFF]  106.17,53.09 0 top
JP75  FIDUCIALUFIDUCIAL  [FIDUCIAL-MICRO]  109.09,33.66 0 top
JP76  FIDUCIALUFIDUCIAL  [FIDUCIAL-MICRO]  85.34,57.4 0 top
JP77  FIDUCIALUFIDUCIAL  [FIDUCIAL-MICRO]  85.34,57.4 0 bottom
JP78  FIDUCIALUFIDUCIAL  [FIDUCIAL-MICRO]  109.09,33.66 0 bottom
JP79  JUMPER-SMT_2_NC_TRACE_SILK  [SMT-JUMPER_2_NC_TRACE_SILK]  101.09,46.74 270 bottom
JP80  JUMPER-SMT_2_NO_SILK  [SMT-JUMPER_2_NO_SILK]  103.63,46.74 90 bottom
JP81  JUMPER-SMT_2_NO_SILK  [SMT-JUMPER_2_NO_SILK]  106.17,46.74 90 bottom
JP82  STAND-OFF  [STAND-OFF]  114.3,53.09 0 top
JP83  STAND-OFF  [STAND-OFF]  132.08,53.09 0 top
JP84  FIDUCIALUFIDUCIAL  [FIDUCIAL-MICRO]  135,33.66 0 top
JP85  FIDUCIALUFIDUCIAL  [FIDUCIAL-MICRO]  111.25,57.4 0 top
JP86  FIDUCIALUFIDUCIAL  [FIDUCIAL-MICRO]  111.25,57.4 0 bottom
JP87  FIDUCIALUFIDUCIAL  [FIDUCIAL-MICRO]  135,33.66 0 bottom
JP88  JUMPER-SMT_2_NC_TRACE_SILK  [SMT-JUMPER_2_NC_TRACE_SILK]  127,46.74 270 bottom
JP89  JUMPER-SMT_2_NO_SILK  [SMT-JUMPER_2_NO_SILK]  129.54,46.74 90 bottom
JP90  JUMPER-SMT_2_NO_SILK  [SMT-JUMPER_2_NO_SILK]  132.08,46.74 90 bottom
JP91  STAND-OFF  [STAND-OFF]  10.67,78.99 0 top
JP92  STAND-OFF  [STAND-OFF]  28.45,78.99 0 top
JP93  FIDUCIALUFIDUCIAL  [FIDUCIAL-MICRO]  31.37,59.56 0 top
JP94  FIDUCIALUFIDUCIAL  [FIDUCIAL-MICRO]  7.62,83.31 0 top
JP95  FIDUCIALUFIDUCIAL  [FIDUCIAL-MICRO]  7.62,83.31 0 bottom
JP96  FIDUCIALUFIDUCIAL  [FIDUCIAL-MICRO]  31.37,59.56 0 bottom
JP97  JUMPER-SMT_2_NC_TRACE_SILK  [SMT-JUMPER_2_NC_TRACE_SILK]  23.37,72.64 270 bottom
JP98  JUMPER-SMT_2_NO_SILK  [SMT-JUMPER_2_NO_SILK]  25.91,72.64 90 bottom
JP99  JUMPER-SMT_2_NO_SILK  [SMT-JUMPER_2_NO_SILK]  28.45,72.64 90 bottom
JP100  STAND-OFF  [STAND-OFF]  36.58,78.99 0 top
JP101  STAND-OFF  [STAND-OFF]  54.36,78.99 0 top
JP102  FIDUCIALUFIDUCIAL  [FIDUCIAL-MICRO]  57.28,59.56 0 top
JP103  FIDUCIALUFIDUCIAL  [FIDUCIAL-MICRO]  33.53,83.31 0 top
JP104  FIDUCIALUFIDUCIAL  [FIDUCIAL-MICRO]  33.53,83.31 0 bottom
JP105  FIDUCIALUFIDUCIAL  [FIDUCIAL-MICRO]  57.28,59.56 0 bottom
JP106  JUMPER-SMT_2_NC_TRACE_SILK  [SMT-JUMPER_2_NC_TRACE_SILK]  49.28,72.64 270 bottom
JP107  JUMPER-SMT_2_NO_SILK  [SMT-JUMPER_2_NO_SILK]  51.82,72.64 90 bottom
JP108  JUMPER-SMT_2_NO_SILK  [SMT-JUMPER_2_NO_SILK]  54.36,72.64 90 bottom
JP109  STAND-OFF  [STAND-OFF]  62.48,78.99 0 top
JP110  STAND-OFF  [STAND-OFF]  80.26,78.99 0 top
JP111  FIDUCIALUFIDUCIAL  [FIDUCIAL-MICRO]  83.19,59.56 0 top
JP112  FIDUCIALUFIDUCIAL  [FIDUCIAL-MICRO]  59.44,83.31 0 top
JP113  FIDUCIALUFIDUCIAL  [FIDUCIAL-MICRO]  59.44,83.31 0 bottom
JP114  FIDUCIALUFIDUCIAL  [FIDUCIAL-MICRO]  83.19,59.56 0 bottom
JP115  JUMPER-SMT_2_NC_TRACE_SILK  [SMT-JUMPER_2_NC_TRACE_SILK]  75.18,72.64 270 bottom
JP116  JUMPER-SMT_2_NO_SILK  [SMT-JUMPER_2_NO_SILK]  77.72,72.64 90 bottom
JP117  JUMPER-SMT_2_NO_SILK  [SMT-JUMPER_2_NO_SILK]  80.26,72.64 90 bottom
JP118  STAND-OFF  [STAND-OFF]  88.39,78.99 0 top
JP119  STAND-OFF  [STAND-OFF]  106.17,78.99 0 top
JP120  FIDUCIALUFIDUCIAL  [FIDUCIAL-MICRO]  109.09,59.56 0 top
JP121  FIDUCIALUFIDUCIAL  [FIDUCIAL-MICRO]  85.34,83.31 0 top
JP122  FIDUCIALUFIDUCIAL  [FIDUCIAL-MICRO]  85.34,83.31 0 bottom
JP123  FIDUCIALUFIDUCIAL  [FIDUCIAL-MICRO]  109.09,59.56 0 bottom
JP124  JUMPER-SMT_2_NC_TRACE_SILK  [SMT-JUMPER_2_NC_TRACE_SILK]  101.09,72.64 270 bottom
JP125  JUMPER-SMT_2_NO_SILK  [SMT-JUMPER_2_NO_SILK]  103.63,72.64 90 bottom
JP126  JUMPER-SMT_2_NO_SILK  [SMT-JUMPER_2_NO_SILK]  106.17,72.64 90 bottom
JP127  STAND-OFF  [STAND-OFF]  114.3,78.99 0 top
JP128  STAND-OFF  [STAND-OFF]  132.08,78.99 0 top
JP129  FIDUCIALUFIDUCIAL  [FIDUCIAL-MICRO]  135,59.56 0 top
JP130  FIDUCIALUFIDUCIAL  [FIDUCIAL-MICRO]  111.25,83.31 0 top
JP131  FIDUCIALUFIDUCIAL  [FIDUCIAL-MICRO]  111.25,83.31 0 bottom
JP132  FIDUCIALUFIDUCIAL  [FIDUCIAL-MICRO]  135,59.56 0 bottom
JP133  JUMPER-SMT_2_NC_TRACE_SILK  [SMT-JUMPER_2_NC_TRACE_SILK]  127,72.64 270 bottom
JP134  JUMPER-SMT_2_NO_SILK  [SMT-JUMPER_2_NO_SILK]  129.54,72.64 90 bottom
JP135  JUMPER-SMT_2_NO_SILK  [SMT-JUMPER_2_NO_SILK]  132.08,72.64 90 bottom
JP136  STAND-OFF  [STAND-OFF]  10.67,104.9 0 top
JP137  STAND-OFF  [STAND-OFF]  28.45,104.9 0 top
JP138  FIDUCIALUFIDUCIAL  [FIDUCIAL-MICRO]  31.37,85.47 0 top
JP139  FIDUCIALUFIDUCIAL  [FIDUCIAL-MICRO]  7.62,109.22 0 top
JP140  FIDUCIALUFIDUCIAL  [FIDUCIAL-MICRO]  7.62,109.22 0 bottom
JP141  FIDUCIALUFIDUCIAL  [FIDUCIAL-MICRO]  31.37,85.47 0 bottom
JP142  JUMPER-SMT_2_NC_TRACE_SILK  [SMT-JUMPER_2_NC_TRACE_SILK]  23.37,98.55 270 bottom
JP143  JUMPER-SMT_2_NO_SILK  [SMT-JUMPER_2_NO_SILK]  25.91,98.55 90 bottom
JP144  JUMPER-SMT_2_NO_SILK  [SMT-JUMPER_2_NO_SILK]  28.45,98.55 90 bottom
JP145  STAND-OFF  [STAND-OFF]  36.58,104.9 0 top
JP146  STAND-OFF  [STAND-OFF]  54.36,104.9 0 top
JP147  FIDUCIALUFIDUCIAL  [FIDUCIAL-MICRO]  57.28,85.47 0 top
JP148  FIDUCIALUFIDUCIAL  [FIDUCIAL-MICRO]  33.53,109.22 0 top
JP149  FIDUCIALUFIDUCIAL  [FIDUCIAL-MICRO]  33.53,109.22 0 bottom
JP150  FIDUCIALUFIDUCIAL  [FIDUCIAL-MICRO]  57.28,85.47 0 bottom
JP151  JUMPER-SMT_2_NC_TRACE_SILK  [SMT-JUMPER_2_NC_TRACE_SILK]  49.28,98.55 270 bottom
JP152  JUMPER-SMT_2_NO_SILK  [SMT-JUMPER_2_NO_SILK]  51.82,98.55 90 bottom
JP153  JUMPER-SMT_2_NO_SILK  [SMT-JUMPER_2_NO_SILK]  54.36,98.55 90 bottom
JP154  STAND-OFF  [STAND-OFF]  62.48,104.9 0 top
JP155  STAND-OFF  [STAND-OFF]  80.26,104.9 0 top
JP156  FIDUCIALUFIDUCIAL  [FIDUCIAL-MICRO]  83.19,85.47 0 top
JP157  FIDUCIALUFIDUCIAL  [FIDUCIAL-MICRO]  59.44,109.22 0 top
JP158  FIDUCIALUFIDUCIAL  [FIDUCIAL-MICRO]  59.44,109.22 0 bottom
JP159  FIDUCIALUFIDUCIAL  [FIDUCIAL-MICRO]  83.19,85.47 0 bottom
JP160  JUMPER-SMT_2_NC_TRACE_SILK  [SMT-JUMPER_2_NC_TRACE_SILK]  75.18,98.55 270 bottom
JP161  JUMPER-SMT_2_NO_SILK  [SMT-JUMPER_2_NO_SILK]  77.72,98.55 90 bottom
JP162  JUMPER-SMT_2_NO_SILK  [SMT-JUMPER_2_NO_SILK]  80.26,98.55 90 bottom
JP163  STAND-OFF  [STAND-OFF]  88.39,104.9 0 top
JP164  STAND-OFF  [STAND-OFF]  106.17,104.9 0 top
JP165  FIDUCIALUFIDUCIAL  [FIDUCIAL-MICRO]  109.09,85.47 0 top
JP166  FIDUCIALUFIDUCIAL  [FIDUCIAL-MICRO]  85.34,109.22 0 top
JP167  FIDUCIALUFIDUCIAL  [FIDUCIAL-MICRO]  85.34,109.22 0 bottom
JP168  FIDUCIALUFIDUCIAL  [FIDUCIAL-MICRO]  109.09,85.47 0 bottom
JP169  JUMPER-SMT_2_NC_TRACE_SILK  [SMT-JUMPER_2_NC_TRACE_SILK]  101.09,98.55 270 bottom
JP170  JUMPER-SMT_2_NO_SILK  [SMT-JUMPER_2_NO_SILK]  103.63,98.55 90 bottom
JP171  JUMPER-SMT_2_NO_SILK  [SMT-JUMPER_2_NO_SILK]  106.17,98.55 90 bottom
JP172  STAND-OFF  [STAND-OFF]  114.3,104.9 0 top
JP173  STAND-OFF  [STAND-OFF]  132.08,104.9 0 top
JP174  FIDUCIALUFIDUCIAL  [FIDUCIAL-MICRO]  135,85.47 0 top
JP175  FIDUCIALUFIDUCIAL  [FIDUCIAL-MICRO]  111.25,109.22 0 top
JP176  FIDUCIALUFIDUCIAL  [FIDUCIAL-MICRO]  111.25,109.22 0 bottom
JP177  FIDUCIALUFIDUCIAL  [FIDUCIAL-MICRO]  135,85.47 0 bottom
JP178  JUMPER-SMT_2_NC_TRACE_SILK  [SMT-JUMPER_2_NC_TRACE_SILK]  127,98.55 270 bottom
JP179  JUMPER-SMT_2_NO_SILK  [SMT-JUMPER_2_NO_SILK]  129.54,98.55 90 bottom
JP180  JUMPER-SMT_2_NO_SILK  [SMT-JUMPER_2_NO_SILK]  132.08,98.55 90 bottom
JP181  STAND-OFF  [STAND-OFF]  10.67,130.81 0 top
JP182  STAND-OFF  [STAND-OFF]  28.45,130.81 0 top
JP183  FIDUCIALUFIDUCIAL  [FIDUCIAL-MICRO]  31.37,111.38 0 top
JP184  FIDUCIALUFIDUCIAL  [FIDUCIAL-MICRO]  7.62,135.13 0 top
JP185  FIDUCIALUFIDUCIAL  [FIDUCIAL-MICRO]  7.62,135.13 0 bottom
JP186  FIDUCIALUFIDUCIAL  [FIDUCIAL-MICRO]  31.37,111.38 0 bottom
JP187  JUMPER-SMT_2_NC_TRACE_SILK  [SMT-JUMPER_2_NC_TRACE_SILK]  23.37,124.46 270 bottom
JP188  JUMPER-SMT_2_NO_SILK  [SMT-JUMPER_2_NO_SILK]  25.91,124.46 90 bottom
JP189  JUMPER-SMT_2_NO_SILK  [SMT-JUMPER_2_NO_SILK]  28.45,124.46 90 bottom
JP190  STAND-OFF  [STAND-OFF]  36.58,130.81 0 top
JP191  STAND-OFF  [STAND-OFF]  54.36,130.81 0 top
JP192  FIDUCIALUFIDUCIAL  [FIDUCIAL-MICRO]  57.28,111.38 0 top
JP193  FIDUCIALUFIDUCIAL  [FIDUCIAL-MICRO]  33.53,135.13 0 top
JP194  FIDUCIALUFIDUCIAL  [FIDUCIAL-MICRO]  33.53,135.13 0 bottom
JP195  FIDUCIALUFIDUCIAL  [FIDUCIAL-MICRO]  57.28,111.38 0 bottom
JP196  JUMPER-SMT_2_NC_TRACE_SILK  [SMT-JUMPER_2_NC_TRACE_SILK]  49.28,124.46 270 bottom
JP197  JUMPER-SMT_2_NO_SILK  [SMT-JUMPER_2_NO_SILK]  51.82,124.46 90 bottom
JP198  JUMPER-SMT_2_NO_SILK  [SMT-JUMPER_2_NO_SILK]  54.36,124.46 90 bottom
JP199  STAND-OFF  [STAND-OFF]  62.48,130.81 0 top
JP200  STAND-OFF  [STAND-OFF]  80.26,130.81 0 top
JP201  FIDUCIALUFIDUCIAL  [FIDUCIAL-MICRO]  83.19,111.38 0 top
JP202  FIDUCIALUFIDUCIAL  [FIDUCIAL-MICRO]  59.44,135.13 0 top
JP203  FIDUCIALUFIDUCIAL  [FIDUCIAL-MICRO]  59.44,135.13 0 bottom
JP204  FIDUCIALUFIDUCIAL  [FIDUCIAL-MICRO]  83.19,111.38 0 bottom
JP205  JUMPER-SMT_2_NC_TRACE_SILK  [SMT-JUMPER_2_NC_TRACE_SILK]  75.18,124.46 270 bottom
JP206  JUMPER-SMT_2_NO_SILK  [SMT-JUMPER_2_NO_SILK]  77.72,124.46 90 bottom
JP207  JUMPER-SMT_2_NO_SILK  [SMT-JUMPER_2_NO_SILK]  80.26,124.46 90 bottom
JP208  STAND-OFF  [STAND-OFF]  88.39,130.81 0 top
JP209  STAND-OFF  [STAND-OFF]  106.17,130.81 0 top
JP210  FIDUCIALUFIDUCIAL  [FIDUCIAL-MICRO]  109.09,111.38 0 top
JP211  FIDUCIALUFIDUCIAL  [FIDUCIAL-MICRO]  85.34,135.13 0 top
JP212  FIDUCIALUFIDUCIAL  [FIDUCIAL-MICRO]  85.34,135.13 0 bottom
JP213  FIDUCIALUFIDUCIAL  [FIDUCIAL-MICRO]  109.09,111.38 0 bottom
JP214  JUMPER-SMT_2_NC_TRACE_SILK  [SMT-JUMPER_2_NC_TRACE_SILK]  101.09,124.46 270 bottom
JP215  JUMPER-SMT_2_NO_SILK  [SMT-JUMPER_2_NO_SILK]  103.63,124.46 90 bottom
JP216  JUMPER-SMT_2_NO_SILK  [SMT-JUMPER_2_NO_SILK]  106.17,124.46 90 bottom
JP217  STAND-OFF  [STAND-OFF]  114.3,130.81 0 top
JP218  STAND-OFF  [STAND-OFF]  132.08,130.81 0 top
JP219  FIDUCIALUFIDUCIAL  [FIDUCIAL-MICRO]  135,111.38 0 top
JP220  FIDUCIALUFIDUCIAL  [FIDUCIAL-MICRO]  111.25,135.13 0 top
JP221  FIDUCIALUFIDUCIAL  [FIDUCIAL-MICRO]  111.25,135.13 0 bottom
JP222  FIDUCIALUFIDUCIAL  [FIDUCIAL-MICRO]  135,111.38 0 bottom
JP223  JUMPER-SMT_2_NC_TRACE_SILK  [SMT-JUMPER_2_NC_TRACE_SILK]  127,124.46 270 bottom
JP224  JUMPER-SMT_2_NO_SILK  [SMT-JUMPER_2_NO_SILK]  129.54,124.46 90 bottom
JP225  JUMPER-SMT_2_NO_SILK  [SMT-JUMPER_2_NO_SILK]  132.08,124.46 90 bottom
LOGO1  OSHW-LOGOS  [OSHW-LOGO-S]  36.58,10.67 0 bottom
LOGO2  OSHW-LOGOS  [OSHW-LOGO-S]  62.48,10.67 0 bottom
LOGO3  OSHW-LOGOS  [OSHW-LOGO-S]  88.39,10.67 0 bottom
LOGO4  OSHW-LOGOS  [OSHW-LOGO-S]  114.3,10.67 0 bottom
LOGO5  OSHW-LOGOS  [OSHW-LOGO-S]  10.67,10.67 0 bottom
LOGO6  OSHW-LOGOS  [OSHW-LOGO-S]  10.67,36.58 0 bottom
LOGO7  OSHW-LOGOS  [OSHW-LOGO-S]  36.58,36.58 0 bottom
LOGO8  OSHW-LOGOS  [OSHW-LOGO-S]  62.48,36.58 0 bottom
LOGO9  OSHW-LOGOS  [OSHW-LOGO-S]  88.39,36.58 0 bottom
LOGO10  OSHW-LOGOS  [OSHW-LOGO-S]  114.3,36.58 0 bottom
LOGO11  OSHW-LOGOS  [OSHW-LOGO-S]  10.67,62.48 0 bottom
LOGO12  OSHW-LOGOS  [OSHW-LOGO-S]  36.58,62.48 0 bottom
LOGO13  OSHW-LOGOS  [OSHW-LOGO-S]  62.48,62.48 0 bottom
LOGO14  OSHW-LOGOS  [OSHW-LOGO-S]  88.39,62.48 0 bottom
LOGO15  OSHW-LOGOS  [OSHW-LOGO-S]  114.3,62.48 0 bottom
LOGO16  OSHW-LOGOS  [OSHW-LOGO-S]  10.67,88.39 0 bottom
LOGO17  OSHW-LOGOS  [OSHW-LOGO-S]  36.58,88.39 0 bottom
LOGO18  OSHW-LOGOS  [OSHW-LOGO-S]  62.48,88.39 0 bottom
LOGO19  OSHW-LOGOS  [OSHW-LOGO-S]  88.39,88.39 0 bottom
LOGO20  OSHW-LOGOS  [OSHW-LOGO-S]  114.3,88.39 0 bottom
LOGO21  OSHW-LOGOS  [OSHW-LOGO-S]  10.67,114.3 0 bottom
LOGO22  OSHW-LOGOS  [OSHW-LOGO-S]  36.58,114.3 0 bottom
LOGO23  OSHW-LOGOS  [OSHW-LOGO-S]  62.48,114.3 0 bottom
LOGO24  OSHW-LOGOS  [OSHW-LOGO-S]  88.39,114.3 0 bottom
LOGO25  OSHW-LOGOS  [OSHW-LOGO-S]  114.3,114.3 0 bottom
PWR  JUMPER-SMT_2_NC_TRACE_SILK  [SMT-JUMPER_2_NC_TRACE_SILK]  13.21,20.83 90 bottom
PWR1  JUMPER-SMT_2_NC_TRACE_SILK  [SMT-JUMPER_2_NC_TRACE_SILK]  39.12,20.83 90 bottom
PWR2  JUMPER-SMT_2_NC_TRACE_SILK  [SMT-JUMPER_2_NC_TRACE_SILK]  65.02,20.83 90 bottom
PWR3  JUMPER-SMT_2_NC_TRACE_SILK  [SMT-JUMPER_2_NC_TRACE_SILK]  90.93,20.83 90 bottom
PWR4  JUMPER-SMT_2_NC_TRACE_SILK  [SMT-JUMPER_2_NC_TRACE_SILK]  116.84,20.83 90 bottom
PWR5  JUMPER-SMT_2_NC_TRACE_SILK  [SMT-JUMPER_2_NC_TRACE_SILK]  13.21,46.74 90 bottom
PWR6  JUMPER-SMT_2_NC_TRACE_SILK  [SMT-JUMPER_2_NC_TRACE_SILK]  39.12,46.74 90 bottom
PWR7  JUMPER-SMT_2_NC_TRACE_SILK  [SMT-JUMPER_2_NC_TRACE_SILK]  65.02,46.74 90 bottom
PWR8  JUMPER-SMT_2_NC_TRACE_SILK  [SMT-JUMPER_2_NC_TRACE_SILK]  90.93,46.74 90 bottom
PWR9  JUMPER-SMT_2_NC_TRACE_SILK  [SMT-JUMPER_2_NC_TRACE_SILK]  116.84,46.74 90 bottom
PWR10  JUMPER-SMT_2_NC_TRACE_SILK  [SMT-JUMPER_2_NC_TRACE_SILK]  13.21,72.64 90 bottom
PWR11  JUMPER-SMT_2_NC_TRACE_SILK  [SMT-JUMPER_2_NC_TRACE_SILK]  39.12,72.64 90 bottom
PWR12  JUMPER-SMT_2_NC_TRACE_SILK  [SMT-JUMPER_2_NC_TRACE_SILK]  65.02,72.64 90 bottom
PWR13  JUMPER-SMT_2_NC_TRACE_SILK  [SMT-JUMPER_2_NC_TRACE_SILK]  90.93,72.64 90 bottom
PWR14  JUMPER-SMT_2_NC_TRACE_SILK  [SMT-JUMPER_2_NC_TRACE_SILK]  116.84,72.64 90 bottom
PWR15  JUMPER-SMT_2_NC_TRACE_SILK  [SMT-JUMPER_2_NC_TRACE_SILK]  13.21,98.55 90 bottom
PWR16  JUMPER-SMT_2_NC_TRACE_SILK  [SMT-JUMPER_2_NC_TRACE_SILK]  39.12,98.55 90 bottom
PWR17  JUMPER-SMT_2_NC_TRACE_SILK  [SMT-JUMPER_2_NC_TRACE_SILK]  65.02,98.55 90 bottom
PWR18  JUMPER-SMT_2_NC_TRACE_SILK  [SMT-JUMPER_2_NC_TRACE_SILK]  90.93,98.55 90 bottom
PWR19  JUMPER-SMT_2_NC_TRACE_SILK  [SMT-JUMPER_2_NC_TRACE_SILK]  116.84,98.55 90 bottom
PWR20  JUMPER-SMT_2_NC_TRACE_SILK  [SMT-JUMPER_2_NC_TRACE_SILK]  13.21,124.46 90 bottom
PWR21  JUMPER-SMT_2_NC_TRACE_SILK  [SMT-JUMPER_2_NC_TRACE_SILK]  39.12,124.46 90 bottom
PWR22  JUMPER-SMT_2_NC_TRACE_SILK  [SMT-JUMPER_2_NC_TRACE_SILK]  65.02,124.46 90 bottom
PWR23  JUMPER-SMT_2_NC_TRACE_SILK  [SMT-JUMPER_2_NC_TRACE_SILK]  90.93,124.46 90 bottom
PWR24  JUMPER-SMT_2_NC_TRACE_SILK  [SMT-JUMPER_2_NC_TRACE_SILK]  116.84,124.46 90 bottom
R1  4.7k  [0603]  15.11,17.02 0 top
R2  4.7k  [0603]  24,17.02 180 top
R3  1k  [0603]  13.21,20.83 270 top
R4  1.20k  [0603]  25.91,20.83 270 top
R5  2.7k  [0603]  28.45,20.83 270 top
R6  1k  [0603]  39.12,20.83 270 top
R7  4.7k  [0603]  41.02,17.02 0 top
R8  4.7k  [0603]  49.91,17.02 180 top
R9  1.20k  [0603]  51.82,20.83 270 top
R10  2.7k  [0603]  54.36,20.83 270 top
R11  1k  [0603]  65.02,20.83 270 top
R12  4.7k  [0603]  66.93,17.02 0 top
R13  4.7k  [0603]  75.82,17.02 180 top
R14  1.20k  [0603]  77.72,20.83 270 top
R15  2.7k  [0603]  80.26,20.83 270 top
R16  1k  [0603]  90.93,20.83 270 top
R17  4.7k  [0603]  92.84,17.02 0 top
R18  4.7k  [0603]  101.73,17.02 180 top
R19  1.20k  [0603]  103.63,20.83 270 top
R20  2.7k  [0603]  106.17,20.83 270 top
R21  1k  [0603]  116.84,20.83 270 top
R22  4.7k  [0603]  118.75,17.02 0 top
R23  4.7k  [0603]  127.64,17.02 180 top
R24  1.20k  [0603]  129.54,20.83 270 top
R25  2.7k  [0603]  132.08,20.83 270 top
R26  1k  [0603]  13.21,46.74 270 top
R27  4.7k  [0603]  15.11,42.93 0 top
R28  4.7k  [0603]  24,42.93 180 top
R29  1.20k  [0603]  25.91,46.74 270 top
R30  2.7k  [0603]  28.45,46.74 270 top
R31  1k  [0603]  39.12,46.74 270 top
R32  4.7k  [0603]  41.02,42.93 0 top
R33  4.7k  [0603]  49.91,42.93 180 top
R34  1.20k  [0603]  51.82,46.74 270 top
R35  2.7k  [0603]  54.36,46.74 270 top
R36  1k  [0603]  65.02,46.74 270 top
R37  4.7k  [0603]  66.93,42.93 0 top
R38  4.7k  [0603]  75.82,42.93 180 top
R39  1.20k  [0603]  77.72,46.74 270 top
R40  2.7k  [0603]  80.26,46.74 270 top
R41  1k  [0603]  90.93,46.74 270 top
R42  4.7k  [0603]  92.84,42.93 0 top
R43  4.7k  [0603]  101.73,42.93 180 top
R44  1.20k  [0603]  103.63,46.74 270 top
R45  2.7k  [0603]  106.17,46.74 270 top
R46  1k  [0603]  116.84,46.74 270 top
R47  4.7k  [0603]  118.75,42.93 0 top
R48  4.7k  [0603]  127.64,42.93 180 top
R49  1.20k  [0603]  129.54,46.74 270 top
R50  2.7k  [0603]  132.08,46.74 270 top
R51  1k  [0603]  13.21,72.64 270 top
R52  4.7k  [0603]  15.11,68.83 0 top
R53  4.7k  [0603]  24,68.83 180 top
R54  1.20k  [0603]  25.91,72.64 270 top
R55  2.7k  [0603]  28.45,72.64 270 top
R56  1k  [0603]  39.12,72.64 270 top
R57  4.7k  [0603]  41.02,68.83 0 top
R58  4.7k  [0603]  49.91,68.83 180 top
R59  1.20k  [0603]  51.82,72.64 270 top
R60  2.7k  [0603]  54.36,72.64 270 top
R61  1k  [0603]  65.02,72.64 270 top
R62  4.7k  [0603]  66.93,68.83 0 top
R63  4.7k  [0603]  75.82,68.83 180 top
R64  1.20k  [0603]  77.72,72.64 270 top
R65  2.7k  [0603]  80.26,72.64 270 top
R66  1k  [0603]  90.93,72.64 270 top
R67  4.7k  [0603]  92.84,68.83 0 top
R68  4.7k  [0603]  101.73,68.83 180 top
R69  1.20k  [0603]  103.63,72.64 270 top
R70  2.7k  [0603]  106.17,72.64 270 top
R71  1k  [0603]  116.84,72.64 270 top
R72  4.7k  [0603]  118.75,68.83 0 top
R73  4.7k  [0603]  127.64,68.83 180 top
R74  1.20k  [0603]  129.54,72.64 270 top
R75  2.7k  [0603]  132.08,72.64 270 top
R76  1k  [0603]  13.21,98.55 270 top
R77  4.7k  [0603]  15.11,94.74 0 top
R78  4.7k  [0603]  24,94.74 180 top
R79  1.20k  [0603]  25.91,98.55 270 top
R80  2.7k  [0603]  28.45,98.55 270 top
R81  1k  [0603]  39.12,98.55 270 top
R82  4.7k  [0603]  41.02,94.74 0 top
R83  4.7k  [0603]  49.91,94.74 180 top
R84  1.20k  [0603]  51.82,98.55 270 top
R85  2.7k  [0603]  54.36,98.55 270 top
R86  1k  [0603]  65.02,98.55 270 top
R87  4.7k  [0603]  66.93,94.74 0 top
R88  4.7k  [0603]  75.82,94.74 180 top
R89  1.20k  [0603]  77.72,98.55 270 top
R90  2.7k  [0603]  80.26,98.55 270 top
R91  1k  [0603]  90.93,98.55 270 top
R92  4.7k  [0603]  92.84,94.74 0 top
R93  4.7k  [0603]  101.73,94.74 180 top
R94  1.20k  [0603]  103.63,98.55 270 top
R95  2.7k  [0603]  106.17,98.55 270 top
R96  1k  [0603]  116.84,98.55 270 top
R97  4.7k  [0603]  118.75,94.74 0 top
R98  4.7k  [0603]  127.64,94.74 180 top
R99  1.20k  [0603]  129.54,98.55 270 top
R100  2.7k  [0603]  132.08,98.55 270 top
R101  1k  [0603]  13.21,124.46 270 top
R102  4.7k  [0603]  15.11,120.65 0 top
R103  4.7k  [0603]  24,120.65 180 top
R104  1.20k  [0603]  25.91,124.46 270 top
R105  2.7k  [0603]  28.45,124.46 270 top
R106  1k  [0603]  39.12,124.46 270 top
R107  4.7k  [0603]  41.02,120.65 0 top
R108  4.7k  [0603]  49.91,120.65 180 top
R109  1.20k  [0603]  51.82,124.46 270 top
R110  2.7k  [0603]  54.36,124.46 270 top
R111  1k  [0603]  65.02,124.46 270 top
R112  4.7k  [0603]  66.93,120.65 0 top
R113  4.7k  [0603]  75.82,120.65 180 top
R114  1.20k  [0603]  77.72,124.46 270 top
R115  2.7k  [0603]  80.26,124.46 270 top
R116  1k  [0603]  90.93,124.46 270 top
R117  4.7k  [0603]  92.84,120.65 0 top
R118  4.7k  [0603]  101.73,120.65 180 top
R119  1.20k  [0603]  103.63,124.46 270 top
R120  2.7k  [0603]  106.17,124.46 270 top
R121  1k  [0603]  116.84,124.46 270 top
R122  4.7k  [0603]  118.75,120.65 0 top
R123  4.7k  [0603]  127.64,120.65 180 top
R124  1.20k  [0603]  129.54,124.46 270 top
R125  2.7k  [0603]  132.08,124.46 270 top
U1  SDP31  [SDP3X]  19.56,27.18 0 top
U2  SDP31  [SDP3X]  45.47,27.18 0 top
U3  SDP31  [SDP3X]  71.37,27.18 0 top
U4  SDP31  [SDP3X]  97.28,27.18 0 top
U5  SDP31  [SDP3X]  123.19,27.18 0 top
U6  SDP31  [SDP3X]  19.56,53.09 0 top
U7  SDP31  [SDP3X]  45.47,53.09 0 top
U8  SDP31  [SDP3X]  71.37,53.09 0 top
U9  SDP31  [SDP3X]  97.28,53.09 0 top
U10  SDP31  [SDP3X]  123.19,53.09 0 top
U11  SDP31  [SDP3X]  19.56,78.99 0 top
U12  SDP31  [SDP3X]  45.47,78.99 0 top
U13  SDP31  [SDP3X]  71.37,78.99 0 top
U14  SDP31  [SDP3X]  97.28,78.99 0 top
U15  SDP31  [SDP3X]  123.19,78.99 0 top
U16  SDP31  [SDP3X]  19.56,104.9 0 top
U17  SDP31  [SDP3X]  45.47,104.9 0 top
U18  SDP31  [SDP3X]  71.37,104.9 0 top
U19  SDP31  [SDP3X]  97.28,104.9 0 top
U20  SDP31  [SDP3X]  123.19,104.9 0 top
U21  SDP31  [SDP3X]  19.56,130.81 0 top
U22  SDP31  [SDP3X]  45.47,130.81 0 top
U23  SDP31  [SDP3X]  71.37,130.81 0 top
U24  SDP31  [SDP3X]  97.28,130.81 0 top
U25  SDP31  [SDP3X]  123.19,130.81 0 top
U$1  [#GND#0]  14.48,10.92 90 bottom
U$2  [#3#3V#0]  17.02,11.05 90 bottom
U$3  [#SDA#0]  19.56,10.92 90 bottom
U$4  [#SCL#0]  22.1,10.79 90 bottom
U$5  [##INT##0]  24.64,10.67 90 top
U$6  [##INT##0]  24.64,10.67 90 bottom
U$7  [#0X21#0]  23.37,17.65 90 bottom
U$8  [#0X22#0]  25.91,17.53 90 bottom
U$9  [#0X23#0]  28.45,17.53 90 bottom
U$10  [DIFFERENTIAL0]  19.56,28.19 0 bottom
U$11  [PRESSURE0]  19.56,26.92 0 bottom
U$12  [SENSOR0]  19.56,25.65 0 bottom
U$13  [SDP310]  19.56,29.46 0 bottom
U$14  [#LED#0]  13.21,22.73 0 bottom
U$15  [I2C]  21.46,18.92 0 bottom
U$16  [QWIIC_5MM]  10.03,8.13 0 top
U$17  [HIGH0]  13.21,23.37 0 top
U$18  SPARKX-LOGO3  [SPARKX-SMALL]  11.3,17.02 0 bottom
U$19  [LOW0]  25.91,23.37 0 top
U$20  SPARKX-LOGO3  [SPARKX-SMALL]  19.56,19.56 0 top
U$21  [#ADDRESS#0]  25.91,22.73 0 bottom
U$22  [I2C]  47.37,18.92 0 bottom
U$23  [QWIIC_5MM]  35.94,8.13 0 top
U$24  SPARKX-LOGO3  [SPARKX-SMALL]  37.21,17.02 0 bottom
U$25  [#PWR#0]  34.92,20.83 90 top
U$26  [#GND#0]  40.39,10.92 90 top
U$27  [#3#3V#0]  42.93,11.05 90 top
U$28  [#SDA#0]  45.47,10.92 90 top
U$29  [#SCL#0]  48.01,10.79 90 top
U$30  [#GND#0]  40.39,10.92 90 bottom
U$31  [#3#3V#0]  42.93,11.05 90 bottom
U$32  [#PWR#0]  9.02,20.83 90 top
U$33  [#GND#0]  14.48,10.92 90 top
U$34  [#3#3V#0]  17.02,11.05 90 top
U$35  [#SDA#0]  19.56,10.92 90 top
U$36  [#SCL#0]  22.1,10.79 90 top
U$37  [#SDA#0]  45.47,10.92 90 bottom
U$38  [#SCL#0]  48.01,10.79 90 bottom
U$39  [#0X21#0]  49.28,17.65 90 bottom
U$40  [#0X22#0]  51.82,17.53 90 bottom
U$41  [#0X23#0]  54.36,17.53 90 bottom
U$42  [DIFFERENTIAL0]  45.47,28.19 0 bottom
U$43  [PRESSURE0]  45.47,26.92 0 bottom
U$44  [SENSOR0]  45.47,25.65 0 bottom
U$45  [SDP310]  45.47,29.46 0 bottom
U$46  [#LED#0]  39.12,22.73 0 bottom
U$47  [HIGH0]  39.12,23.37 0 top
U$48  [LOW0]  51.82,23.37 0 top
U$49  SPARKX-LOGO3  [SPARKX-SMALL]  45.47,19.56 0 top
U$50  [##INT##0]  50.55,10.67 90 top
U$51  [##INT##0]  50.55,10.67 90 bottom
U$52  [#ADDRESS#0]  51.82,22.73 0 bottom
U$53  [I2C]  73.28,18.92 0 bottom
U$54  [QWIIC_5MM]  61.85,8.13 0 top
U$55  SPARKX-LOGO3  [SPARKX-SMALL]  63.12,17.02 0 bottom
U$56  [#PWR#0]  60.83,20.83 90 top
U$57  [#GND#0]  66.29,10.92 90 top
U$58  [#3#3V#0]  68.83,11.05 90 top
U$59  [#SDA#0]  71.37,10.92 90 top
U$60  [#SCL#0]  73.91,10.79 90 top
U$61  [#GND#0]  66.29,10.92 90 bottom
U$62  [#3#3V#0]  68.83,11.05 90 bottom
U$63  [#SDA#0]  71.37,10.92 90 bottom
U$64  [#SCL#0]  73.91,10.79 90 bottom
U$65  [#0X21#0]  75.18,17.65 90 bottom
U$66  [#0X22#0]  77.72,17.53 90 bottom
U$67  [#0X23#0]  80.26,17.53 90 bottom
U$68  [DIFFERENTIAL0]  71.37,28.19 0 bottom
U$69  [PRESSURE0]  71.37,26.92 0 bottom
U$70  [SENSOR0]  71.37,25.65 0 bottom
U$71  [SDP310]  71.37,29.46 0 bottom
U$72  [#LED#0]  65.02,22.73 0 bottom
U$73  [HIGH0]  65.02,23.37 0 top
U$74  [LOW0]  77.72,23.37 0 top
U$75  SPARKX-LOGO3  [SPARKX-SMALL]  71.37,19.56 0 top
U$76  [##INT##0]  76.45,10.67 90 top
U$77  [##INT##0]  76.45,10.67 90 bottom
U$78  [#ADDRESS#0]  77.72,22.73 0 bottom
U$79  [I2C]  99.19,18.92 0 bottom
U$80  [QWIIC_5MM]  87.76,8.13 0 top
U$81  SPARKX-LOGO3  [SPARKX-SMALL]  89.03,17.02 0 bottom
U$82  [#PWR#0]  86.74,20.83 90 top
U$83  [#GND#0]  92.2,10.92 90 top
U$84  [#3#3V#0]  94.74,11.05 90 top
U$85  [#SDA#0]  97.28,10.92 90 top
U$86  [#SCL#0]  99.82,10.79 90 top
U$87  [#GND#0]  92.2,10.92 90 bottom
U$88  [#3#3V#0]  94.74,11.05 90 bottom
U$89  [#SDA#0]  97.28,10.92 90 bottom
U$90  [#SCL#0]  99.82,10.79 90 bottom
U$91  [#0X21#0]  101.09,17.65 90 bottom
U$92  [#0X22#0]  103.63,17.53 90 bottom
U$93  [#0X23#0]  106.17,17.53 90 bottom
U$94  [DIFFERENTIAL0]  97.28,28.19 0 bottom
U$95  [PRESSURE0]  97.28,26.92 0 bottom
U$96  [SENSOR0]  97.28,25.65 0 bottom
U$97  [SDP310]  97.28,29.46 0 bottom
U$98  [#LED#0]  90.93,22.73 0 bottom
U$99  [HIGH0]  90.93,23.37 0 top
U$100  [LOW0]  103.63,23.37 0 top
U$101  SPARKX-LOGO3  [SPARKX-SMALL]  97.28,19.56 0 top
U$102  [##INT##0]  102.36,10.67 90 top
U$103  [##INT##0]  102.36,10.67 90 bottom
U$104  [#ADDRESS#0]  103.63,22.73 0 bottom
U$105  [I2C]  125.09,18.92 0 bottom
U$106  [QWIIC_5MM]  113.67,8.13 0 top
U$107  SPARKX-LOGO3  [SPARKX-SMALL]  114.94,17.02 0 bottom
U$108  [#PWR#0]  112.65,20.83 90 top
U$109  [#GND#0]  118.11,10.92 90 top
U$110  [#3#3V#0]  120.65,11.05 90 top
U$111  [#SDA#0]  123.19,10.92 90 top
U$112  [#SCL#0]  125.73,10.79 90 top
U$113  [#GND#0]  118.11,10.92 90 bottom
U$114  [#3#3V#0]  120.65,11.05 90 bottom
U$115  [#SDA#0]  123.19,10.92 90 bottom
U$116  [#SCL#0]  125.73,10.79 90 bottom
U$117  [#0X21#0]  127,17.65 90 bottom
U$118  [#0X22#0]  129.54,17.53 90 bottom
U$119  [#0X23#0]  132.08,17.53 90 bottom
U$120  [DIFFERENTIAL0]  123.19,28.19 0 bottom
U$121  [PRESSURE0]  123.19,26.92 0 bottom
U$122  [SENSOR0]  123.19,25.65 0 bottom
U$123  [SDP310]  123.19,29.46 0 bottom
U$124  [#LED#0]  116.84,22.73 0 bottom
U$125  [HIGH0]  116.84,23.37 0 top
U$126  [LOW0]  129.54,23.37 0 top
U$127  SPARKX-LOGO3  [SPARKX-SMALL]  123.19,19.56 0 top
U$128  [##INT##0]  128.27,10.67 90 top
U$129  [##INT##0]  128.27,10.67 90 bottom
U$130  [#ADDRESS#0]  129.54,22.73 0 bottom
U$131  [I2C]  21.46,44.83 0 bottom
U$132  [QWIIC_5MM]  10.03,34.04 0 top
U$133  SPARKX-LOGO3  [SPARKX-SMALL]  11.3,42.93 0 bottom
U$134  [#PWR#0]  9.02,46.74 90 top
U$135  [#GND#0]  14.48,36.83 90 top
U$136  [#3#3V#0]  17.02,36.96 90 top
U$137  [#SDA#0]  19.56,36.83 90 top
U$138  [#SCL#0]  22.1,36.7 90 top
U$139  [#GND#0]  14.48,36.83 90 bottom
U$140  [#3#3V#0]  17.02,36.96 90 bottom
U$141  [#SDA#0]  19.56,36.83 90 bottom
U$142  [#SCL#0]  22.1,36.7 90 bottom
U$143  [#0X21#0]  23.37,43.56 90 bottom
U$144  [#0X22#0]  25.91,43.43 90 bottom
U$145  [#0X23#0]  28.45,43.43 90 bottom
U$146  [DIFFERENTIAL0]  19.56,54.1 0 bottom
U$147  [PRESSURE0]  19.56,52.83 0 bottom
U$148  [SENSOR0]  19.56,51.56 0 bottom
U$149  [SDP310]  19.56,55.37 0 bottom
U$150  [#LED#0]  13.21,48.64 0 bottom
U$151  [HIGH0]  13.21,49.28 0 top
U$152  [LOW0]  25.91,49.28 0 top
U$153  SPARKX-LOGO3  [SPARKX-SMALL]  19.56,45.47 0 top
U$154  [##INT##0]  24.64,36.58 90 top
U$155  [##INT##0]  24.64,36.58 90 bottom
U$156  [#ADDRESS#0]  25.91,48.64 0 bottom
U$157  [I2C]  47.37,44.83 0 bottom
U$158  [QWIIC_5MM]  35.94,34.04 0 top
U$159  SPARKX-LOGO3  [SPARKX-SMALL]  37.21,42.93 0 bottom
U$160  [#PWR#0]  34.92,46.74 90 top
U$161  [#GND#0]  40.39,36.83 90 top
U$162  [#3#3V#0]  42.93,36.96 90 top
U$163  [#SDA#0]  45.47,36.83 90 top
U$164  [#SCL#0]  48.01,36.7 90 top
U$165  [#GND#0]  40.39,36.83 90 bottom
U$166  [#3#3V#0]  42.93,36.96 90 bottom
U$167  [#SDA#0]  45.47,36.83 90 bottom
U$168  [#SCL#0]  48.01,36.7 90 bottom
U$169  [#0X21#0]  49.28,43.56 90 bottom
U$170  [#0X22#0]  51.82,43.43 90 bottom
U$171  [#0X23#0]  54.36,43.43 90 bottom
U$172  [DIFFERENTIAL0]  45.47,54.1 0 bottom
U$173  [PRESSURE0]  45.47,52.83 0 bottom
U$174  [SENSOR0]  45.47,51.56 0 bottom
U$175  [SDP310]  45.47,55.37 0 bottom
U$176  [#LED#0]  39.12,48.64 0 bottom
U$177  [HIGH0]  39.12,49.28 0 top
U$178  [LOW0]  51.82,49.28 0 top
U$179  SPARKX-LOGO3  [SPARKX-SMALL]  45.47,45.47 0 top
U$180  [##INT##0]  50.55,36.58 90 top
U$181  [##INT##0]  50.55,36.58 90 bottom
U$182  [#ADDRESS#0]  51.82,48.64 0 bottom
U$183  [I2C]  73.28,44.83 0 bottom
U$184  [QWIIC_5MM]  61.85,34.04 0 top
U$185  SPARKX-LOGO3  [SPARKX-SMALL]  63.12,42.93 0 bottom
U$186  [#PWR#0]  60.83,46.74 90 top
U$187  [#GND#0]  66.29,36.83 90 top
U$188  [#3#3V#0]  68.83,36.96 90 top
U$189  [#SDA#0]  71.37,36.83 90 top
U$190  [#SCL#0]  73.91,36.7 90 top
U$191  [#GND#0]  66.29,36.83 90 bottom
U$192  [#3#3V#0]  68.83,36.96 90 bottom
U$193  [#SDA#0]  71.37,36.83 90 bottom
U$194  [#SCL#0]  73.91,36.7 90 bottom
U$195  [#0X21#0]  75.18,43.56 90 bottom
U$196  [#0X22#0]  77.72,43.43 90 bottom
U$197  [#0X23#0]  80.26,43.43 90 bottom
U$198  [DIFFERENTIAL0]  71.37,54.1 0 bottom
U$199  [PRESSURE0]  71.37,52.83 0 bottom
U$200  [SENSOR0]  71.37,51.56 0 bottom
U$201  [SDP310]  71.37,55.37 0 bottom
U$202  [#LED#0]  65.02,48.64 0 bottom
U$203  [HIGH0]  65.02,49.28 0 top
U$204  [LOW0]  77.72,49.28 0 top
U$205  SPARKX-LOGO3  [SPARKX-SMALL]  71.37,45.47 0 top
U$206  [##INT##0]  76.45,36.58 90 top
U$207  [##INT##0]  76.45,36.58 90 bottom
U$208  [#ADDRESS#0]  77.72,48.64 0 bottom
U$209  [I2C]  99.19,44.83 0 bottom
U$210  [QWIIC_5MM]  87.76,34.04 0 top
U$211  SPARKX-LOGO3  [SPARKX-SMALL]  89.03,42.93 0 bottom
U$212  [#PWR#0]  86.74,46.74 90 top
U$213  [#GND#0]  92.2,36.83 90 top
U$214  [#3#3V#0]  94.74,36.96 90 top
U$215  [#SDA#0]  97.28,36.83 90 top
U$216  [#SCL#0]  99.82,36.7 90 top
U$217  [#GND#0]  92.2,36.83 90 bottom
U$218  [#3#3V#0]  94.74,36.96 90 bottom
U$219  [#SDA#0]  97.28,36.83 90 bottom
U$220  [#SCL#0]  99.82,36.7 90 bottom
U$221  [#0X21#0]  101.09,43.56 90 bottom
U$222  [#0X22#0]  103.63,43.43 90 bottom
U$223  [#0X23#0]  106.17,43.43 90 bottom
U$224  [DIFFERENTIAL0]  97.28,54.1 0 bottom
U$225  [PRESSURE0]  97.28,52.83 0 bottom
U$226  [SENSOR0]  97.28,51.56 0 bottom
U$227  [SDP310]  97.28,55.37 0 bottom
U$228  [#LED#0]  90.93,48.64 0 bottom
U$229  [HIGH0]  90.93,49.28 0 top
U$230  [LOW0]  103.63,49.28 0 top
U$231  SPARKX-LOGO3  [SPARKX-SMALL]  97.28,45.47 0 top
U$232  [##INT##0]  102.36,36.58 90 top
U$233  [##INT##0]  102.36,36.58 90 bottom
U$234  [#ADDRESS#0]  103.63,48.64 0 bottom
U$235  [I2C]  125.09,44.83 0 bottom
U$236  [QWIIC_5MM]  113.67,34.04 0 top
U$237  SPARKX-LOGO3  [SPARKX-SMALL]  114.94,42.93 0 bottom
U$238  [#PWR#0]  112.65,46.74 90 top
U$239  [#GND#0]  118.11,36.83 90 top
U$240  [#3#3V#0]  120.65,36.96 90 top
U$241  [#SDA#0]  123.19,36.83 90 top
U$242  [#SCL#0]  125.73,36.7 90 top
U$243  [#GND#0]  118.11,36.83 90 bottom
U$244  [#3#3V#0]  120.65,36.96 90 bottom
U$245  [#SDA#0]  123.19,36.83 90 bottom
U$246  [#SCL#0]  125.73,36.7 90 bottom
U$247  [#0X21#0]  127,43.56 90 bottom
U$248  [#0X22#0]  129.54,43.43 90 bottom
U$249  [#0X23#0]  132.08,43.43 90 bottom
U$250  [DIFFERENTIAL0]  123.19,54.1 0 bottom
U$251  [PRESSURE0]  123.19,52.83 0 bottom
U$252  [SENSOR0]  123.19,51.56 0 bottom
U$253  [SDP310]  123.19,55.37 0 bottom
U$254  [#LED#0]  116.84,48.64 0 bottom
U$255  [HIGH0]  116.84,49.28 0 top
U$256  [LOW0]  129.54,49.28 0 top
U$257  SPARKX-LOGO3  [SPARKX-SMALL]  123.19,45.47 0 top
U$258  [##INT##0]  128.27,36.58 90 top
U$259  [##INT##0]  128.27,36.58 90 bottom
U$260  [#ADDRESS#0]  129.54,48.64 0 bottom
U$261  [I2C]  21.46,70.74 0 bottom
U$262  [QWIIC_5MM]  10.03,59.94 0 top
U$263  SPARKX-LOGO3  [SPARKX-SMALL]  11.3,68.83 0 bottom
U$264  [#PWR#0]  9.02,72.64 90 top
U$265  [#GND#0]  14.48,62.74 90 top
U$266  [#3#3V#0]  17.02,62.86 90 top
U$267  [#SDA#0]  19.56,62.74 90 top
U$268  [#SCL#0]  22.1,62.61 90 top
U$269  [#GND#0]  14.48,62.74 90 bottom
U$270  [#3#3V#0]  17.02,62.86 90 bottom
U$271  [#SDA#0]  19.56,62.74 90 bottom
U$272  [#SCL#0]  22.1,62.61 90 bottom
U$273  [#0X21#0]  23.37,69.47 90 bottom
U$274  [#0X22#0]  25.91,69.34 90 bottom
U$275  [#0X23#0]  28.45,69.34 90 bottom
U$276  [DIFFERENTIAL0]  19.56,80.01 0 bottom
U$277  [PRESSURE0]  19.56,78.74 0 bottom
U$278  [SENSOR0]  19.56,77.47 0 bottom
U$279  [SDP310]  19.56,81.28 0 bottom
U$280  [#LED#0]  13.21,74.55 0 bottom
U$281  [HIGH0]  13.21,75.18 0 top
U$282  [LOW0]  25.91,75.18 0 top
U$283  SPARKX-LOGO3  [SPARKX-SMALL]  19.56,71.37 0 top
U$284  [##INT##0]  24.64,62.48 90 top
U$285  [##INT##0]  24.64,62.48 90 bottom
U$286  [#ADDRESS#0]  25.91,74.55 0 bottom
U$287  [I2C]  47.37,70.74 0 bottom
U$288  [QWIIC_5MM]  35.94,59.94 0 top
U$289  SPARKX-LOGO3  [SPARKX-SMALL]  37.21,68.83 0 bottom
U$290  [#PWR#0]  34.92,72.64 90 top
U$291  [#GND#0]  40.39,62.74 90 top
U$292  [#3#3V#0]  42.93,62.86 90 top
U$293  [#SDA#0]  45.47,62.74 90 top
U$294  [#SCL#0]  48.01,62.61 90 top
U$295  [#GND#0]  40.39,62.74 90 bottom
U$296  [#3#3V#0]  42.93,62.86 90 bottom
U$297  [#SDA#0]  45.47,62.74 90 bottom
U$298  [#SCL#0]  48.01,62.61 90 bottom
U$299  [#0X21#0]  49.28,69.47 90 bottom
U$300  [#0X22#0]  51.82,69.34 90 bottom
U$301  [#0X23#0]  54.36,69.34 90 bottom
U$302  [DIFFERENTIAL0]  45.47,80.01 0 bottom
U$303  [PRESSURE0]  45.47,78.74 0 bottom
U$304  [SENSOR0]  45.47,77.47 0 bottom
U$305  [SDP310]  45.47,81.28 0 bottom
U$306  [#LED#0]  39.12,74.55 0 bottom
U$307  [HIGH0]  39.12,75.18 0 top
U$308  [LOW0]  51.82,75.18 0 top
U$309  SPARKX-LOGO3  [SPARKX-SMALL]  45.47,71.37 0 top
U$310  [##INT##0]  50.55,62.48 90 top
U$311  [##INT##0]  50.55,62.48 90 bottom
U$312  [#ADDRESS#0]  51.82,74.55 0 bottom
U$313  [I2C]  73.28,70.74 0 bottom
U$314  [QWIIC_5MM]  61.85,59.94 0 top
U$315  SPARKX-LOGO3  [SPARKX-SMALL]  63.12,68.83 0 bottom
U$316  [#PWR#0]  60.83,72.64 90 top
U$317  [#GND#0]  66.29,62.74 90 top
U$318  [#3#3V#0]  68.83,62.86 90 top
U$319  [#SDA#0]  71.37,62.74 90 top
U$320  [#SCL#0]  73.91,62.61 90 top
U$321  [#GND#0]  66.29,62.74 90 bottom
U$322  [#3#3V#0]  68.83,62.86 90 bottom
U$323  [#SDA#0]  71.37,62.74 90 bottom
U$324  [#SCL#0]  73.91,62.61 90 bottom
U$325  [#0X21#0]  75.18,69.47 90 bottom
U$326  [#0X22#0]  77.72,69.34 90 bottom
U$327  [#0X23#0]  80.26,69.34 90 bottom
U$328  [DIFFERENTIAL0]  71.37,80.01 0 bottom
U$329  [PRESSURE0]  71.37,78.74 0 bottom
U$330  [SENSOR0]  71.37,77.47 0 bottom
U$331  [SDP310]  71.37,81.28 0 bottom
U$332  [#LED#0]  65.02,74.55 0 bottom
U$333  [HIGH0]  65.02,75.18 0 top
U$334  [LOW0]  77.72,75.18 0 top
U$335  SPARKX-LOGO3  [SPARKX-SMALL]  71.37,71.37 0 top
U$336  [##INT##0]  76.45,62.48 90 top
U$337  [##INT##0]  76.45,62.48 90 bottom
U$338  [#ADDRESS#0]  77.72,74.55 0 bottom
U$339  [I2C]  99.19,70.74 0 bottom
U$340  [QWIIC_5MM]  87.76,59.94 0 top
U$341  SPARKX-LOGO3  [SPARKX-SMALL]  89.03,68.83 0 bottom
U$342  [#PWR#0]  86.74,72.64 90 top
U$343  [#GND#0]  92.2,62.74 90 top
U$344  [#3#3V#0]  94.74,62.86 90 top
U$345  [#SDA#0]  97.28,62.74 90 top
U$346  [#SCL#0]  99.82,62.61 90 top
U$347  [#GND#0]  92.2,62.74 90 bottom
U$348  [#3#3V#0]  94.74,62.86 90 bottom
U$349  [#SDA#0]  97.28,62.74 90 bottom
U$350  [#SCL#0]  99.82,62.61 90 bottom
U$351  [#0X21#0]  101.09,69.47 90 bottom
U$352  [#0X22#0]  103.63,69.34 90 bottom
U$353  [#0X23#0]  106.17,69.34 90 bottom
U$354  [DIFFERENTIAL0]  97.28,80.01 0 bottom
U$355  [PRESSURE0]  97.28,78.74 0 bottom
U$356  [SENSOR0]  97.28,77.47 0 bottom
U$357  [SDP310]  97.28,81.28 0 bottom